# Altium PCB FPW1-0-0.PcbDoc
Units mm, origin at the board's own origin, x right, y up, seen from the top; angles counter-clockwise.
Board outline 81.28 x 53.34 mm, 4 copper layers (Top Layer, GND Plane 1, 3v3 Plane 2, Bottom Layer); 180 components, 250 nets, 840 pads, 6 vias.
Unrouted connection lines stored in the file: 525.
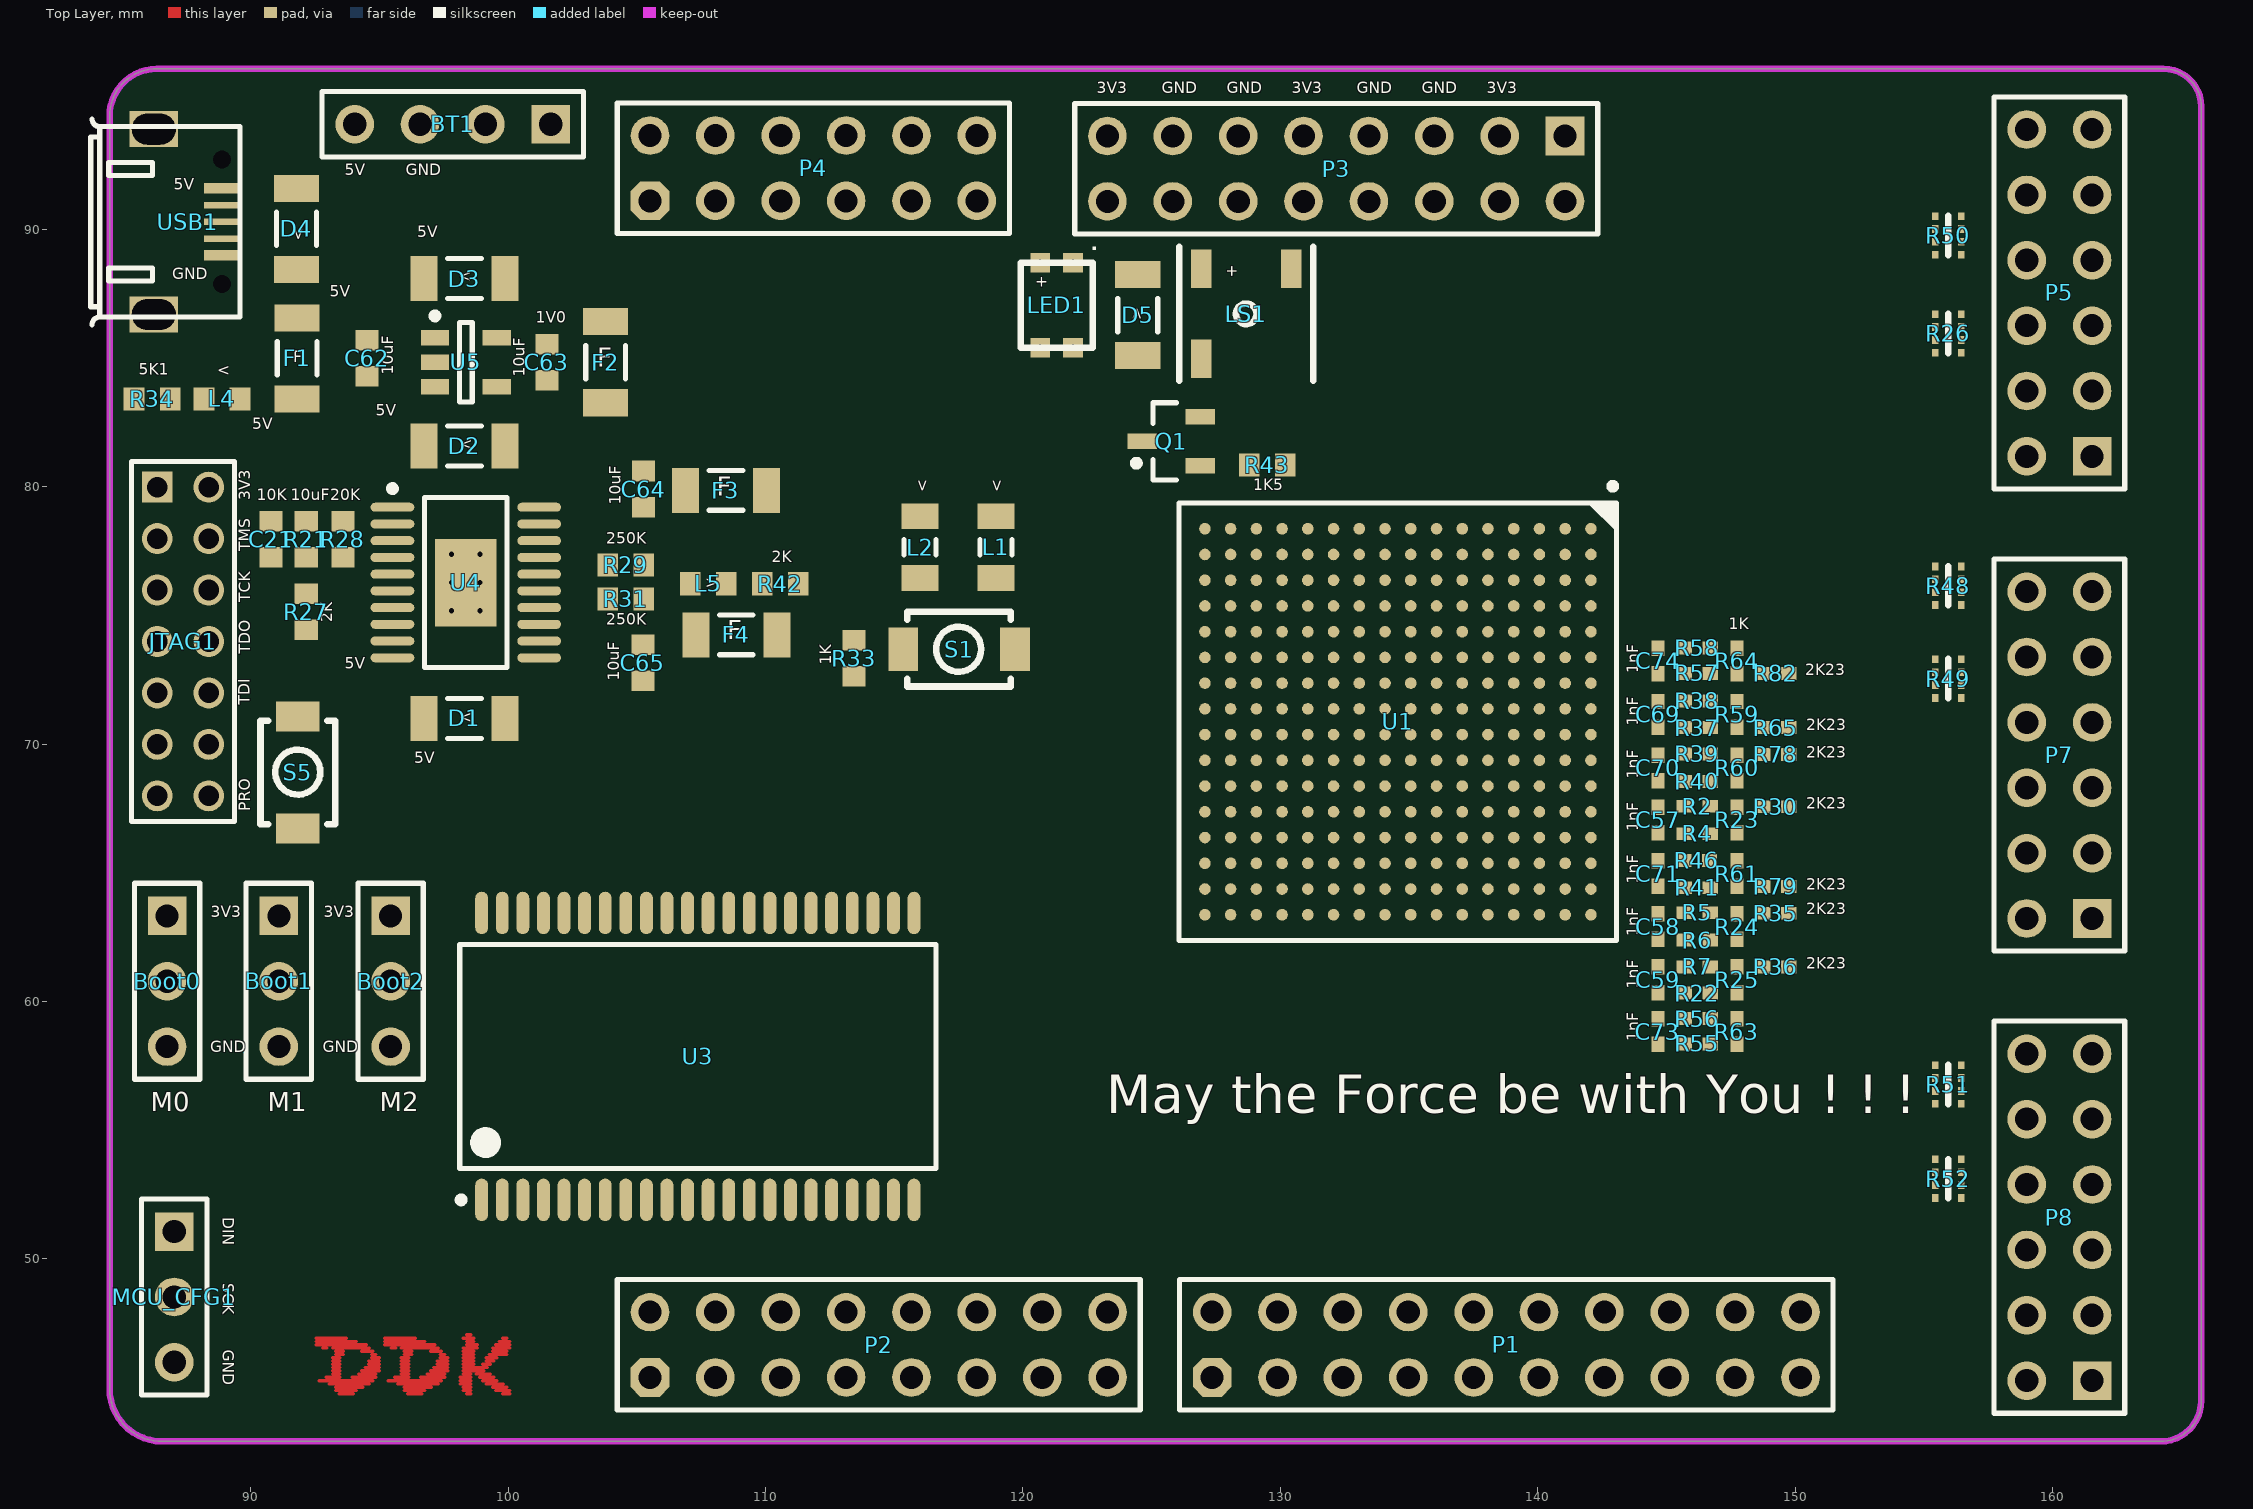
[diagram p0: Top Layer view]
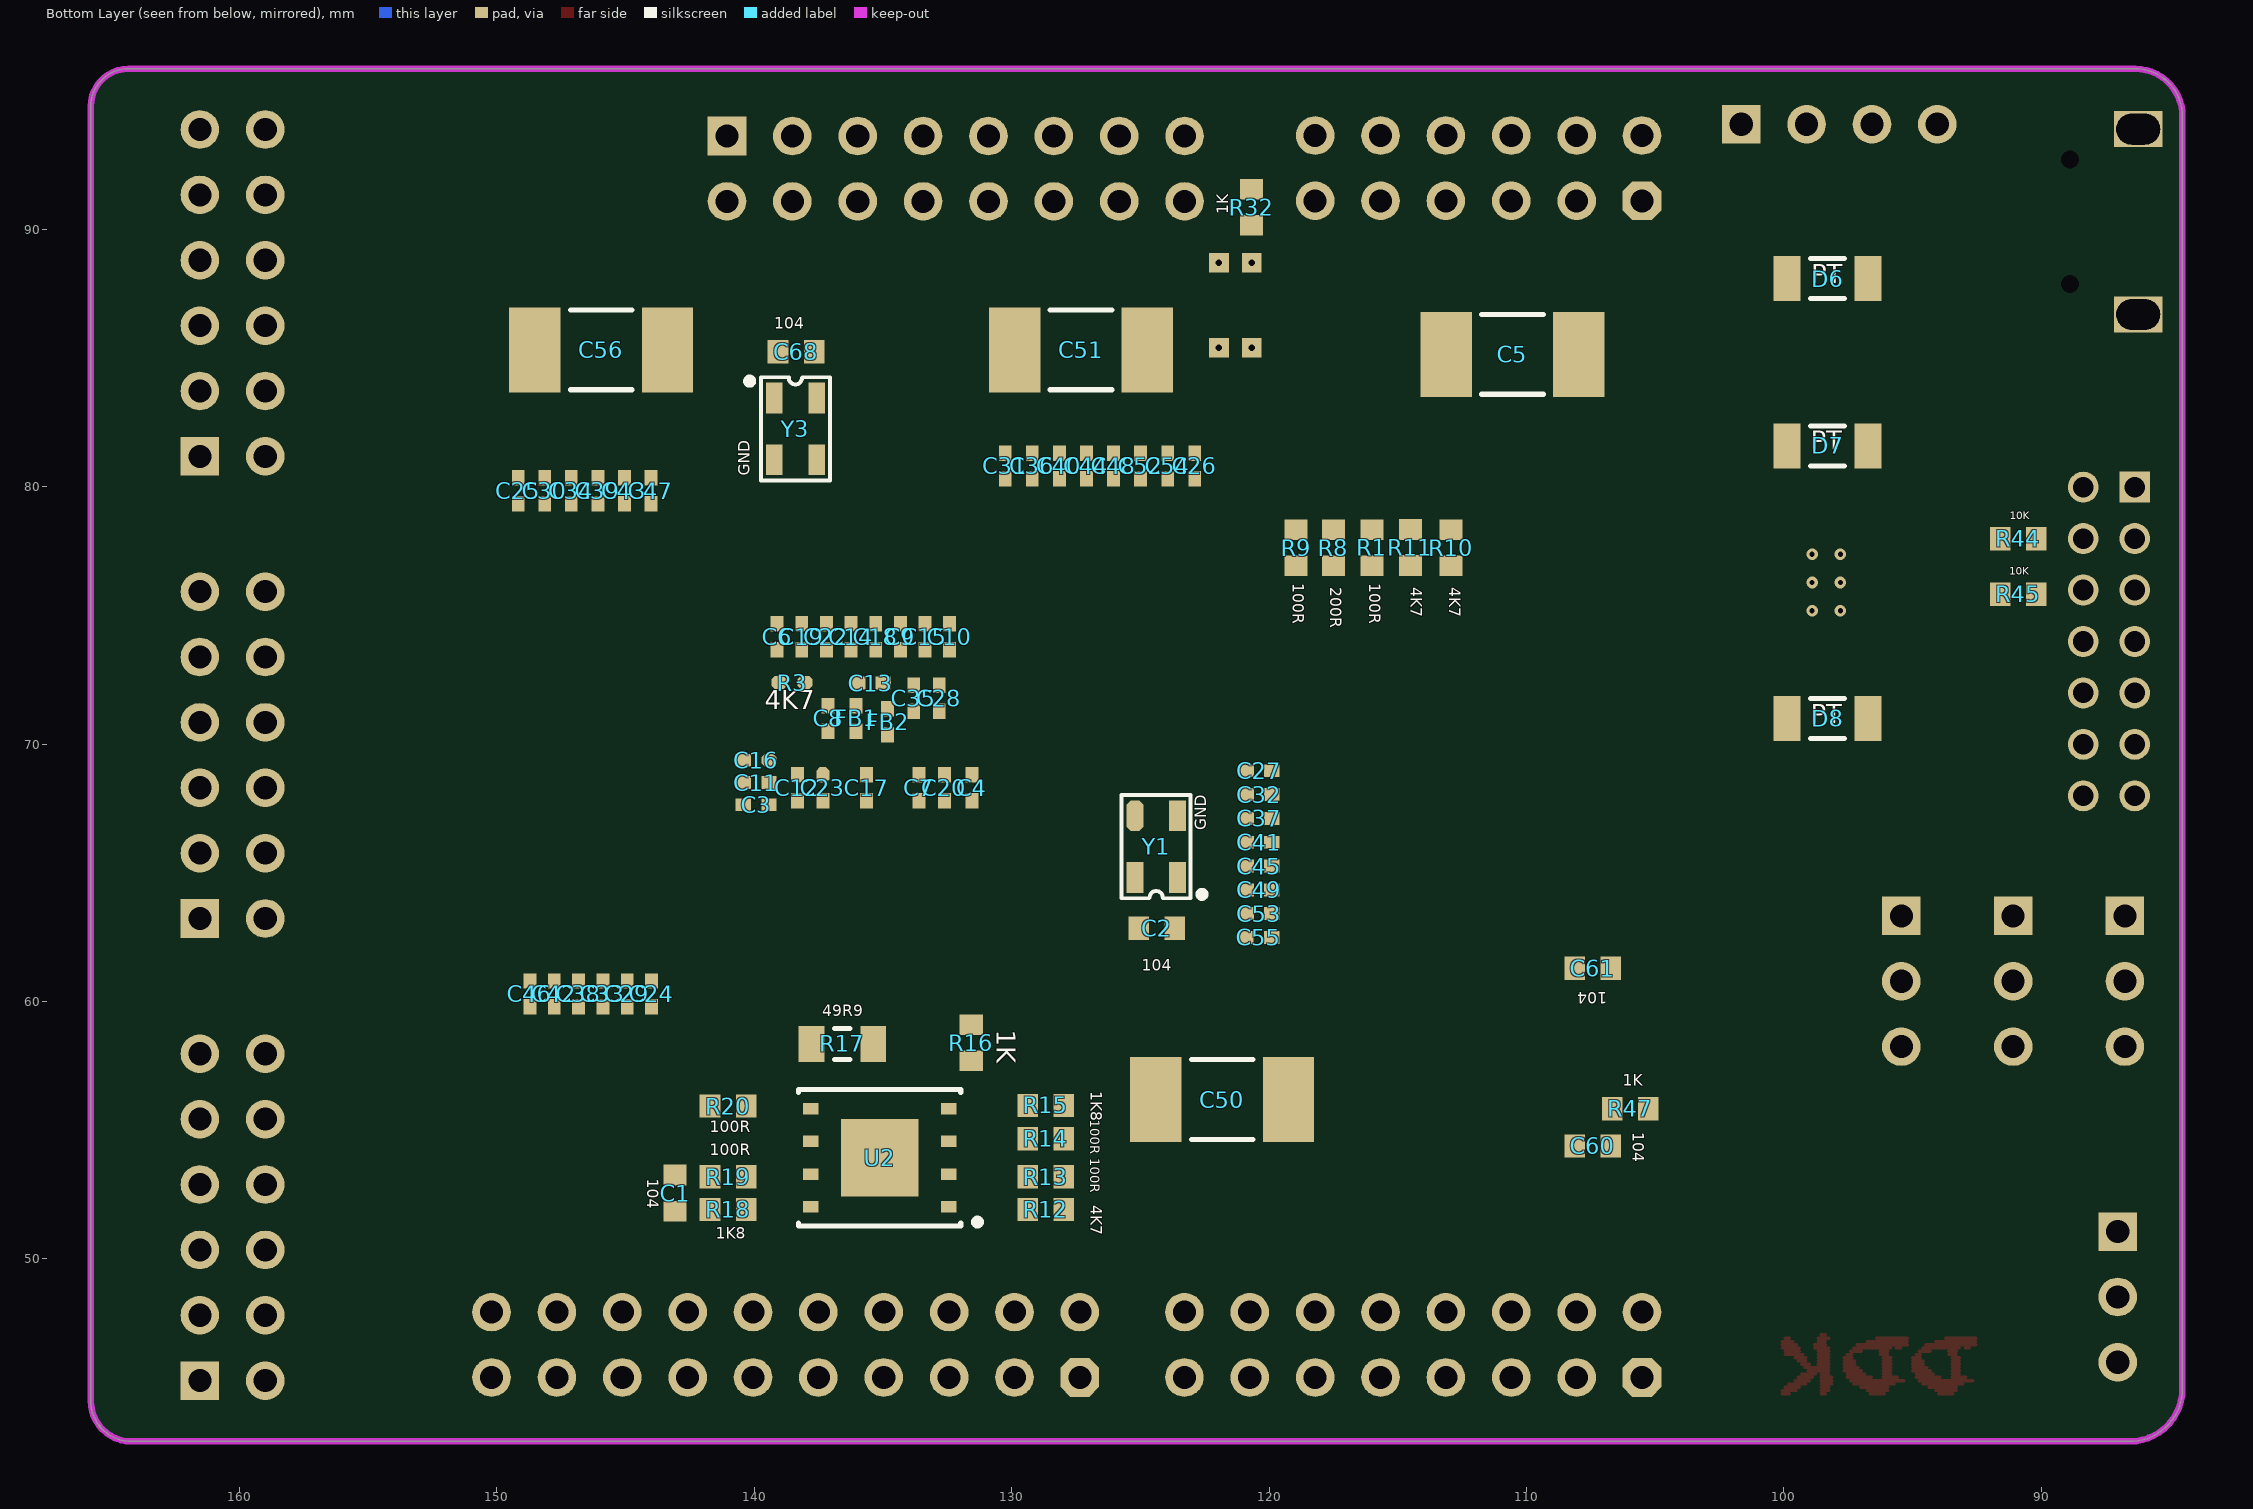
[diagram p1: Bottom Layer view, seen from below]
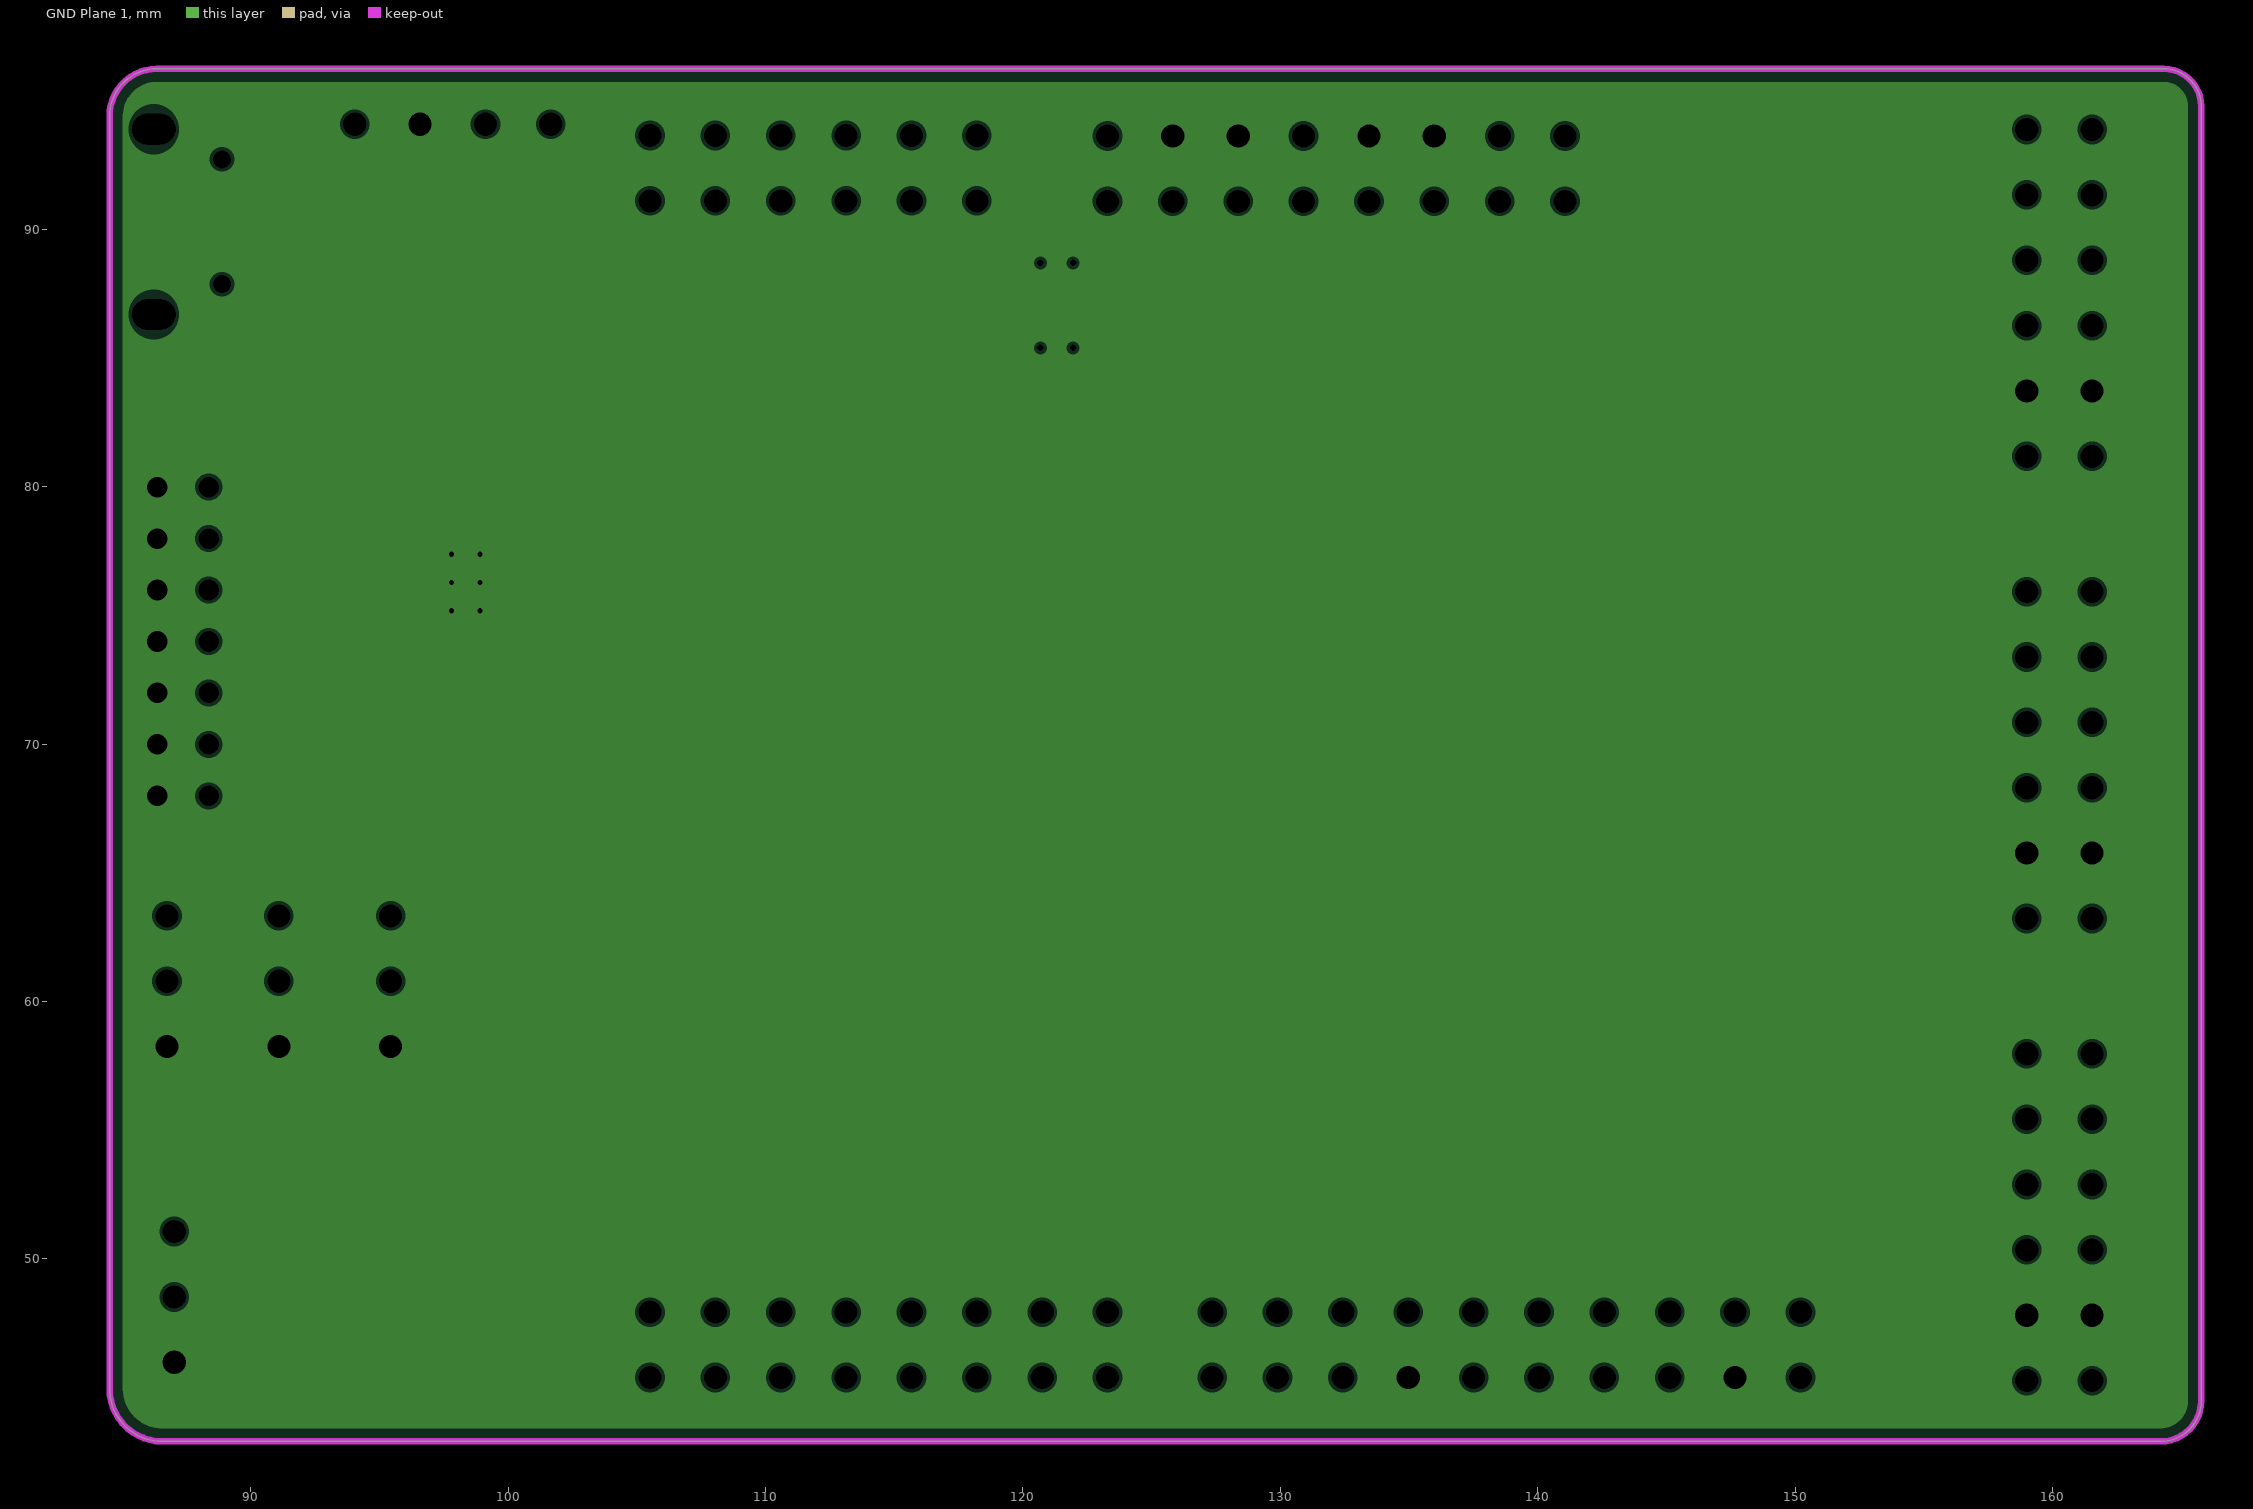
[diagram p2: GND Plane 1, clearances drawn from the general rule]
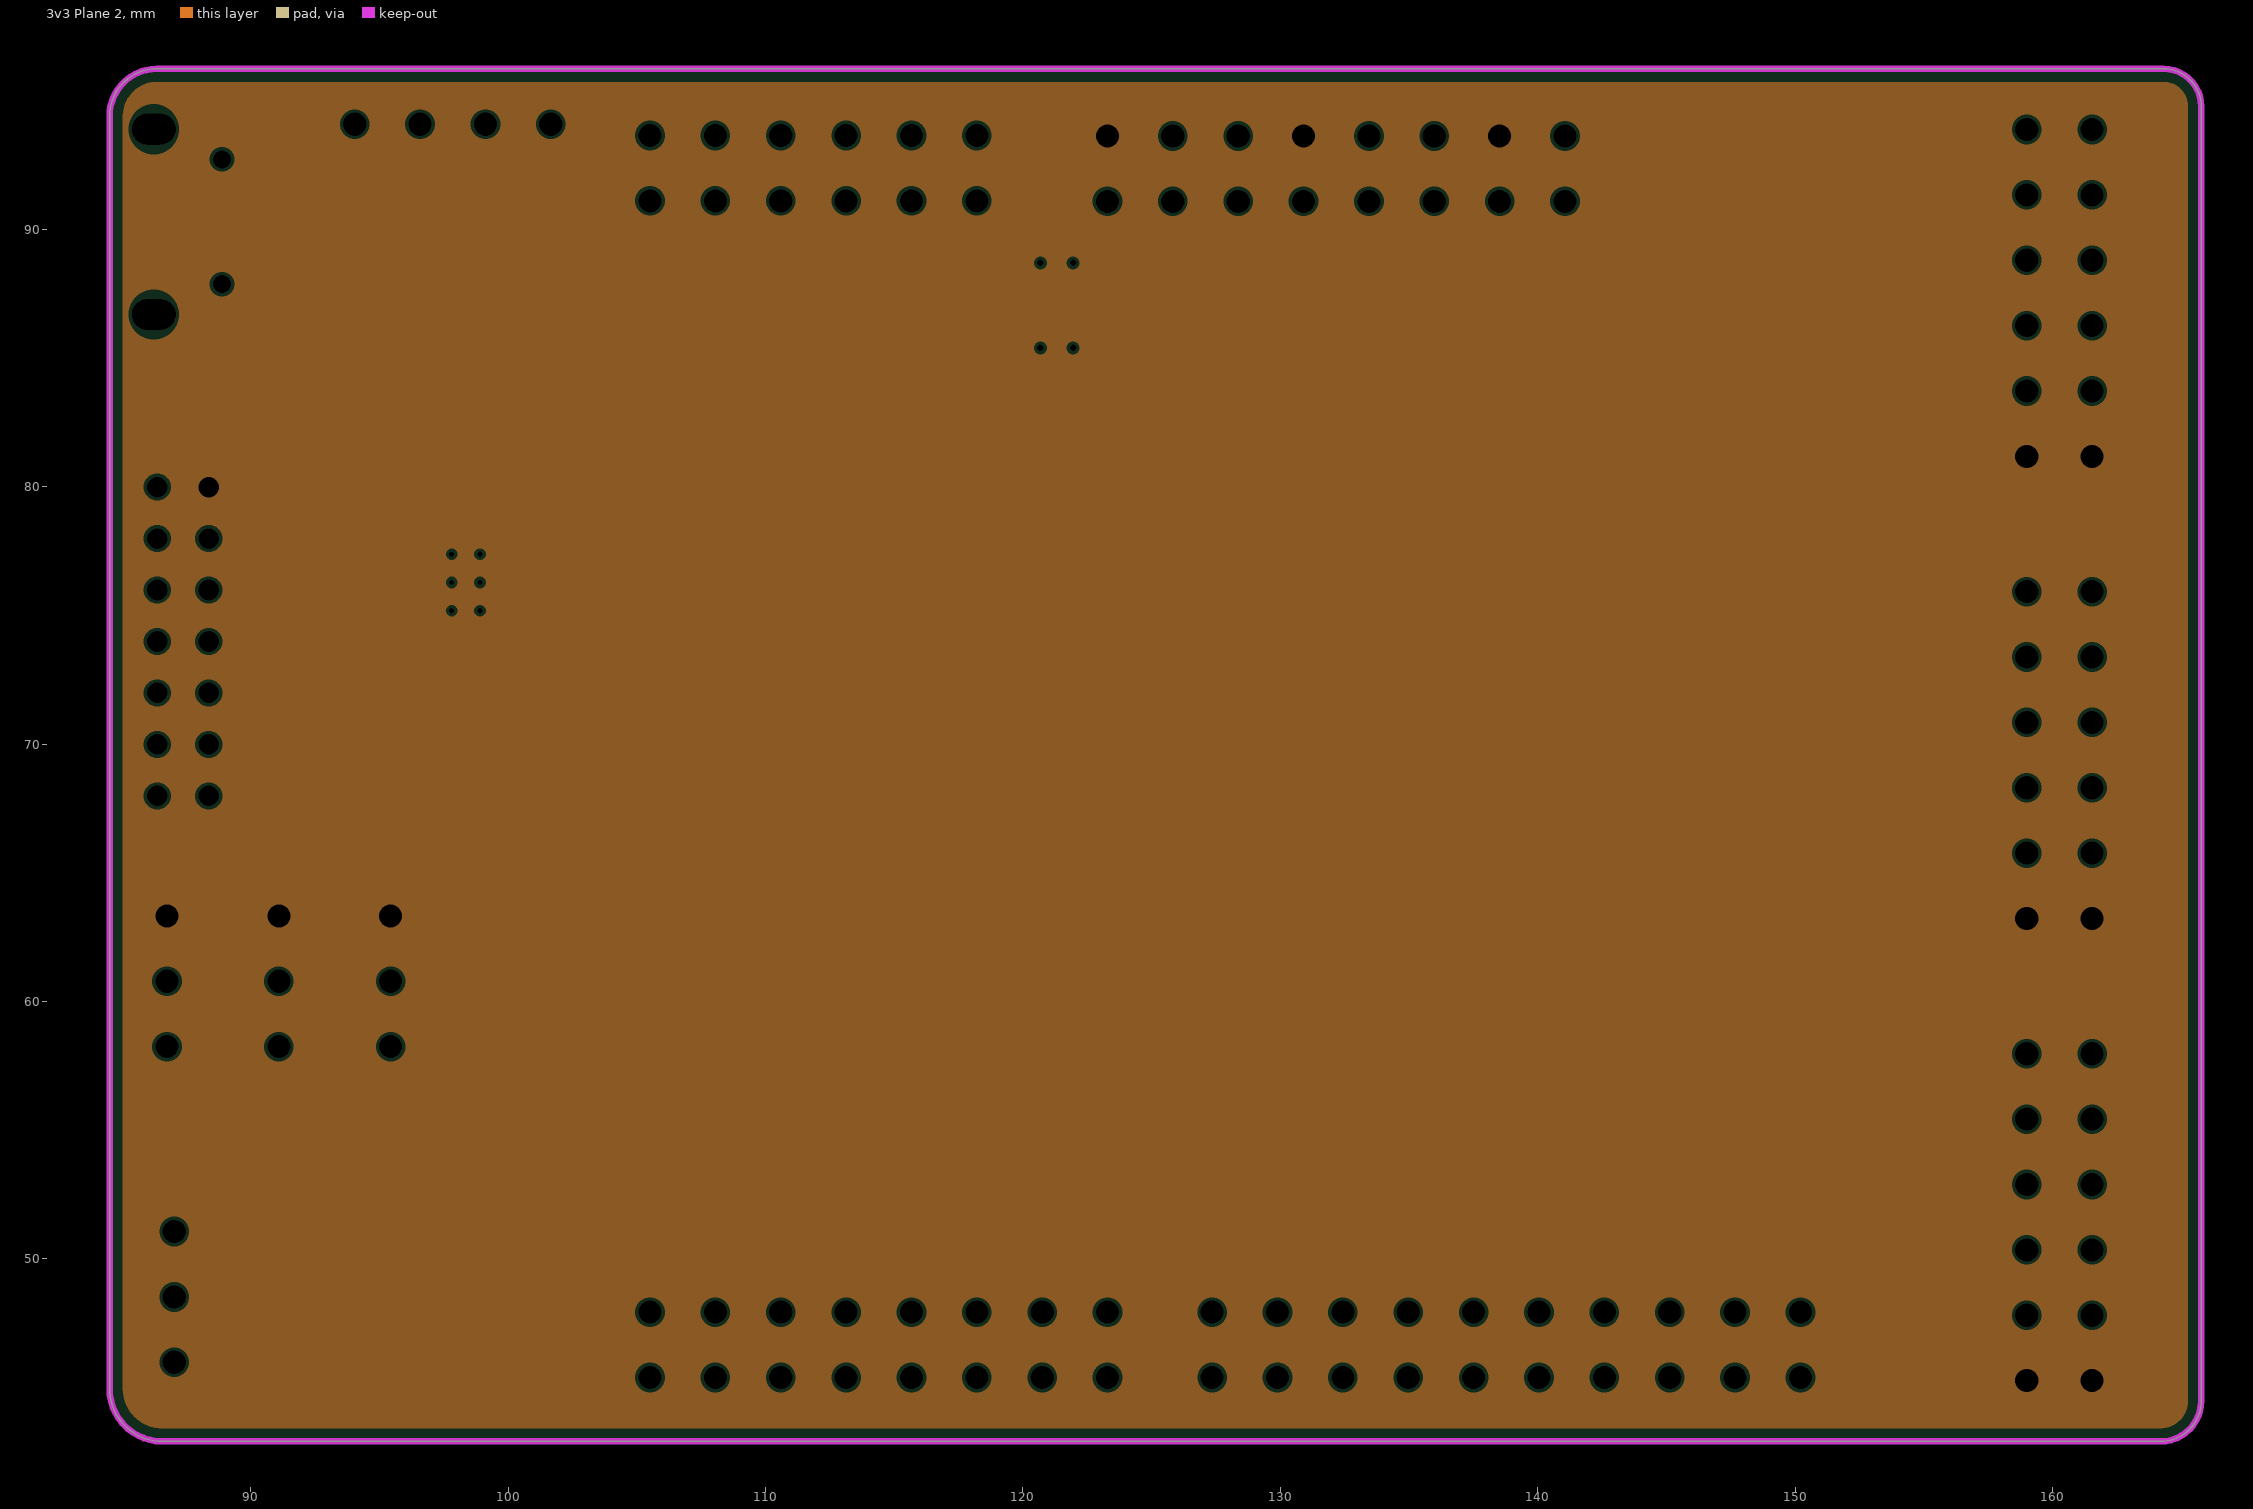
[diagram p3: 3v3 Plane 2, clearances drawn from the general rule]

## Layer stack, top to bottom
Top Layer: signal copper 0.0356
Dielectric: core 0.32, FR-4, Dk 4.8
GND Plane 1: plane copper 0.0356, net GND
Dielectric: prepreg 0.32, FR-4, Dk 4.8
3v3 Plane 2: plane copper 0.0356, net 3V3
Dielectric: core 0.32, FR-4, Dk 4.8
Bottom Layer: signal copper 0.0356

## Board outline
84.506,44.951 84.506,94.401 cw(c86.346,94.401) 86.346,96.241 164.316,96.241 cw(c164.316,94.771) 165.786,94.771 165.786,44.481 cw(c164.206,44.481) 164.206,42.901 86.556,42.901 cw(c86.556,44.951)

## Design rules (kind name [scope] priority, off if disabled: settings)
Clearance ne2rvia [(IsPad OR IsVia)] p1: gap=0.127
Clearance all [All] p2: gap=0.089
DiffPairsRouting [All] p1: maxlimit=0.254 minlimit=0.254 mostfreqgap=0.254 maxuncoupledlength=12.7
PlaneClearance [All] p1: clearance=0.127
PlaneConnect [All] p1: planeconnectstyle=Direct reliefexpansion=0.508 reliefentries=4 reliefconductorwidth=0.254 reliefairgap=0.254
PolygonConnect [All] p1: connectstyle=Relief reliefconductorwidth=0.254 reliefentries=4 polygonreliefangle="90 Angle" airgapwidth=0.254
RoutingVias [All] p1: holewidth=0.711 width=1.27 viastyle="Through Hole" minholewidth=0.2 minwidth=0.45 maxholewidth=0.711 maxwidth=1.27
SolderMaskExpansion [All] p1: expansion=0.025
Width [All] p1: maxlimit=1.27 minlimit=0.089 preferedwidth=0.254 minimp=50.000000 maximp=50.000000 favimp=50.000000
25 further rules are at their usual default settings.

## Classes and differential pairs
net class QEI_B[3..0]: QEI_B1 QEI_B2 QEI_B3
component class power: C21 C62 C63 C64 C65 D1 D2 D3 D4 D6 D7 D8 F1 F2 F3 F4 L4 L5 R21 R27 R28 R29 R31 R34 R42 U4 U5 USB1
net class SRAM-DQ[7..0]: SRAM-DQ0 SRAM-DQ1 SRAM-DQ2 SRAM-DQ3 SRAM-DQ4 SRAM-DQ5 SRAM-DQ6 SRAM-DQ7
net class SRAM-A[18..0]: SRAM-A0 SRAM-A1 SRAM-A2 SRAM-A3 SRAM-A4 SRAM-A5 SRAM-A6 SRAM-A7 SRAM-A8 SRAM-A9 SRAM-A10 SRAM-A11 SRAM-A12 SRAM-A13 SRAM-A14 SRAM-A15 SRAM-A16 SRAM-A17 SRAM-A18
net class BANK35_IO[42..1]: BANK35_IO1 BANK35_IO2 BANK35_IO3 BANK35_IO4 BANK35_IO5 BANK35_IO6 BANK35_IO7 BANK35_IO8 BANK35_IO9 BANK35_IO10 BANK35_IO11 BANK35_IO12 BANK35_IO13 BANK35_IO14 BANK35_IO15 BANK35_IO16 BANK35_IO17 BANK35_IO18 BANK35_IO19 BANK35_IO20 BANK35_IO21 BANK35_IO22 BANK35_IO23 BANK35_IO24 BANK35_IO25 BANK35_IO26 BANK35_IO27 BANK35_IO28 BANK35_IO29 BANK35_IO30 BANK35_IO31 BANK35_IO32 BANK35_IO33 BANK35_IO34 BANK35_IO35 BANK35_IO36 BANK35_IO37 BANK35_IO38 BANK35_IO39 BANK35_IO40 BANK35_IO41 BANK35_IO42 IO0
component class FPGA_CFG: Boot0 Boot1 Boot2 JTAG1 L1 L2 MCU_CFG1 R1 R3 R8 R9 R10 R11 R44 R45 S5 U1
component class MEMORY: C60 C61 R47 U3
component class IO: BT1 C57 C58 C59 C69 C70 C71 C73 C74 D5 LED1 LS1 P1 P2 P3 P4 P5 P7 P8 Q1 R2 R4 R5 R6 R7 R22 R23 R24 R25 R26 R30 R32 R33 R35 R36 R37 R38 R39 R40 R41 R43 R46 R48 R49 R50 R51 R52 R55 R56 R57 R58 R59 R60 R61 R63 R64 R65 R78 R79 R82 S1
component class FPGA_IO: C1 C2 C68 R12 R13 R14 R15 R16 R17 R18 R19 R20 U2 Y1 Y3
component class FPGA_POWER: C3 C4 C5 C6 C7 C8 C9 C10 C11 C12 C13 C14 C15 C16 C17 C18 C19 C20 C22 C23 C24 C25 C26 C27 C28 C29 C30 C31 C32 C33 C34 C35 C36 C37 C38 C39 C40 C41 C42 C43 C44 C45 C46 C47 C48 C49 C50 C51 C52 C53 C54 C55 C56 FB1 FB2
net class BANK14_IO[10..1]: BANK14_IO1 BANK14_IO2 BANK14_IO3 BANK14_IO4 BANK14_IO5 BANK14_IO6 BANK14_IO7 BANK14_IO8 BANK14_IO9 BANK14_IO10
net class BANK15_IO[36..1]: BANK15_IO1 BANK15_IO2 BANK15_IO3 BANK15_IO4 BANK15_IO5 BANK15_IO6 BANK15_IO7 BANK15_IO8 BANK15_IO9 BANK15_IO10 BANK15_IO11 BANK15_IO12 BANK15_IO13 BANK15_IO14 BANK15_IO15 BANK15_IO16 BANK15_IO17 BANK15_IO18 BANK15_IO19 BANK15_IO20 BANK15_IO21 BANK15_IO22 BANK15_IO23 BANK15_IO24 BANK15_IO25 BANK15_IO26 BANK15_IO27 BANK15_IO28 BANK15_IO29 BANK15_IO30 BANK15_IO31 BANK15_IO32 BANK15_IO33 BANK15_IO34 BANK15_IO35 BANK15_IO36
net class BANK34_IO[20..1]: BANK34_IO1 BANK34_IO2 BANK34_IO3 BANK34_IO4 BANK34_IO5 BANK34_IO6 BANK34_IO7 BANK34_IO8 BANK34_IO9 BANK34_IO10 BANK34_IO11 BANK34_IO12 BANK34_IO13 BANK34_IO14 BANK34_IO15 BANK34_IO16 BANK34_IO17 BANK34_IO18 BANK34_IO19 BANK34_IO20
differential pair AD12: +AD12_P -AD12_N
differential pair AD11: +AD11_P -AD11_N
differential pair AD10: +AD10_P -AD10_N
differential pair AD9: +AD9_P -AD9_N
differential pair AD8: +AD8_P -AD8_N
differential pair AD4: +AD4_P -AD4_N
differential pair AD3: +AD3_P -AD3_N
differential pair AD2: +AD2_P -AD2_N
differential pair AD1: +AD1_P -AD1_N

## Components (designator, comment, footprint, x,y, rotation, side; value= is the part's Value field where it differs from the comment)
Boot0 "Header 3" HDR1X3 86.741,63.322 r270 top
Boot1 "Header 3" HDR1X3 91.084,63.322 r270 top
Boot2 "Header 3" HDR1X3 95.428,63.322 r270 top
BT1 "Header 4" HDR1X4 101.651,94.082 r180 top
C1 "Cap" 1608[0603] 143.078,52.553 r90 bottom (schematic designator C16)
C2 "Cap" 1608[0603] 124.358,62.84 r0 bottom
C3 "Cap" 0402#1 139.929,67.64 r0 bottom
C4 "Cap" 0402#1 131.547,68.301 r270 bottom
C5 "Cap" 2512 110.541,85.141 r0 bottom (schematic designator C20)
C6 "Cap" 0402#1 139.116,74.168 r90 bottom (schematic designator C53)
C7 "Cap" 0402#1 133.604,68.301 r270 bottom
C8 "Cap" 0402#1 137.135,70.993 r90 bottom (schematic designator C29)
C9 "Cap" 0402#1 134.326,74.168 r90 bottom (schematic designator C30)
C10 "Cap" 0402#1 132.41,74.168 r90 bottom (schematic designator C31)
C11 "Cap" 0402#1 139.929,68.504 r0 bottom
C12 "Cap" 0402#1 138.328,68.301 r270 bottom
C13 "Cap" 0402#1 135.484,72.365 r180 bottom (schematic designator C56)
C14 "Cap" 0402#1 136.242,74.168 r90 bottom (schematic designator C96)
C15 "Cap" 0402#1 133.368,74.168 r90 bottom (schematic designator C95)
C16 "Cap" 0402#2 139.929,69.367 r0 bottom
C17 "Cap" 0402#1 135.636,68.301 r270 bottom
C18 "Cap" 0402#1 135.284,74.168 r90 bottom (schematic designator C91)
C19 "Cap" 0402#1 138.158,74.168 r90 bottom (schematic designator C92)
C20 "Cap" 0402#1 132.613,68.301 r270 bottom (schematic designator C90)
C21 "Cap" 1608[0603] 90.78,77.953 r270 top
C22 "Cap" 0402#1 137.2,74.168 r90 bottom (schematic designator C75)
C23 "Cap" 0402#2 137.338,68.301 r270 bottom
C24 "Cap" 0402#1 143.993,60.292 r270 bottom
C25 "Cap" 0402#1 149.174,79.84 r90 bottom
C26 "Cap" 0402#1 122.885,80.805 r90 bottom
C27 "Cap" 0402#1 120.388,68.961 r180 bottom
C28 "Cap" 0402#1 132.817,71.78 r90 bottom
C29 "Cap" 0402#1 144.937,60.292 r270 bottom
C30 "Cap" 0402#1 148.143,79.84 r90 bottom
C31 "Cap" 0402#1 130.251,80.805 r90 bottom
C32 "Cap" 0402#1 120.388,68.036 r180 bottom
C33 "Cap" 0402#1 145.882,60.292 r270 bottom
C34 "Cap" 0402#1 147.112,79.84 r90 bottom
C35 "Cap" 0402#1 133.807,71.78 r90 bottom
C36 "Cap" 0402#1 129.199,80.805 r90 bottom
C37 "Cap" 0402#1 120.388,67.11 r180 bottom
C38 "Cap" 0402#1 146.827,60.292 r270 bottom
C39 "Cap" 0402#1 146.08,79.84 r90 bottom
C40 "Cap" 0402#1 128.147,80.805 r90 bottom
C41 "Cap" 0402#1 120.388,66.185 r180 bottom
C42 "Cap" 0402#1 147.772,60.292 r270 bottom
C43 "Cap" 0402#1 145.049,79.84 r90 bottom
C44 "Cap" 0402#1 127.094,80.805 r90 bottom
C45 "Cap" 0402#1 120.388,65.26 r180 bottom
C46 "Cap" 0402#1 148.717,60.292 r270 bottom
C47 "Cap" 0402#1 144.018,79.84 r90 bottom
C48 "Cap" 0402#1 126.042,80.805 r90 bottom
C49 "Cap" 0402#1 120.388,64.335 r180 bottom
C50 "Cap" 2512 121.818,56.185 r180 bottom
C51 "Cap" 2512 127.305,85.319 r180 bottom
C52 "Cap" 0402#1 124.99,80.805 r90 bottom
C53 "Cap" 0402#1 120.388,63.409 r180 bottom
C54 "Cap" 0402#1 123.937,80.805 r90 bottom
C55 "Cap" 0402#1 120.396,62.484 r180 bottom
C56 "Cap" 2512 145.948,85.319 r0 bottom
C57 "Cap" 0402#1 144.678,67.048 r90 top (schematic designator C52)
C58 "Cap" 0402#1 144.678,62.909 r90 top (schematic designator C39)
C59 "Cap" 0402#1 144.678,60.841 r90 top (schematic designator C40)
C60 "Cap" 1608[0603] 107.417,54.381 r180 bottom (schematic designator C41)
C61 "Cap" 1608[0603] 107.417,61.29 r180 bottom (schematic designator C42)
C62 "Cap" 1608[0603] 94.513,84.988 r270 top (schematic designator C43)
C63 "Cap" 1608[0603] 101.498,84.836 r270 top (schematic designator C44)
C64 "Cap" 1608[0603] 105.258,79.908 r90 top (schematic designator C32)
C65 "Cap" 1608[0603] 105.232,73.152 r270 top (schematic designator C33)
C68 "Cap" 1608[0603] 138.379,85.242 r180 bottom
C69 "Cap" 0402#1 144.678,71.152 r270 top
C70 "Cap" 0402#1 144.678,69.071 r90 top
C71 "Cap" 0402#1 144.678,64.967 r270 top
C73 "Cap" 0402#1 144.67,58.828 r270 top
C74 "Cap" 0402#1 144.678,73.228 r270 top
D1 "SK34" 1206 98.298,70.993 r180 top
D2 "SK34" 1206 98.298,81.585 r180 top
D3 "SK34" 1206 98.298,88.087 r180 top
D4 "SK34" 1206 91.77,90.018 r270 top
D5 "SK34" 1206 124.46,86.665 r90 top
D6 "稳压" 1206 98.298,88.087 r0 bottom
D7 "稳压" 1206 98.298,81.585 r0 bottom
D8 "稳压" 1206 98.298,70.993 r0 bottom
F1 "Fuse 1" 1206 91.796,84.988 r90 top
F2 "Fuse 1" 1206 103.784,84.836 r90 top
F3 "Fuse 1" 1206 108.458,79.858 r180 top
F4 "Fuse 1" 1206 108.864,74.244 r180 top
FB1 "Inductor" 0402#1 136.042,70.993 r90 bottom (schematic designator FB2)
FB2 "Inductor" 0402#1 134.823,70.866 r90 bottom (schematic designator FB1)
JTAG1 "MHDR2X7" "Hearder2 7X2" 86.36,79.985 r0 top
L1 "LED" C2012 118.948,77.648 r270 top (schematic designator L8)
L2 "LED" C2012 116.002,77.648 r270 top
L4 "LED" 1608[0603] 88.875,83.414 r180 top
L5 "LED" 1608[0603] 107.772,76.225 r0 top
LED1 "RGB_LED1206" RGB 121.31,87.046 r270 top
LS1 "Bell" "MLT-5020 BZ" 128.676,86.716 r270 top
MCU_CFG1 "Header 3" HDR1X3 87.02,51.054 r270 top
P1 "Header 10X2" HDR2X10 127.351,45.386 r0 top
P2 "Header 8X2" HDR2X8#1 105.507,45.386 r0 top
P3 "Header 8X2" HDR2X8#2 141.062,93.626 r180 top
P4 "Header 6X2" HDR2X6#1 105.507,91.106 r0 top
P5 "Header 6X2" HDR2X6#2 161.544,81.178 r90 top
P7 "Header 6X2" HDR2X6#2 161.544,63.221 r90 top
P8 "Header 6X2" HDR2X6#2 161.544,45.263 r90 top
Q1 "QNPN" SOT23_N 125.755,81.763 r180 top
R1 "Res" 1608[0603] 116.002,77.622 r270 bottom
R2 "Res" 0402#1 146.202,67.581 r0 top
R3 "Res" 0402#3 138.532,72.39 r180 bottom (schematic designator R51)
R4 "Res" 0402#1 146.202,66.513 r0 top
R5 "Res" 0402#1 146.202,63.446 r0 top
R6 "Res" 0402#1 146.202,62.378 r0 top
R7 "Res" 0402#1 146.202,61.341 r0 top
R8 "Res" 1608[0603] 117.5,77.622 r90 bottom (schematic designator R63)
R9 "Res" 1608[0603] 118.948,77.622 r270 bottom (schematic designator R64)
R10 "Res" 1608[0603] 112.928,77.622 r90 bottom (schematic designator R55)
R11 "Res" 1608[0603] 114.503,77.637 r90 bottom (schematic designator R49)
R12 "Res" 1608[0603] 128.676,51.918 r0 bottom (schematic designator R66)
R13 "Res" 1608[0603] 128.676,53.188 r180 bottom (schematic designator R62)
R14 "Res" 1608[0603] 128.676,54.661 r180 bottom (schematic designator R54)
R15 "Res" 1608[0603] 128.676,55.956 r0 bottom (schematic designator R52)
R16 "Res" 1608[0603] 131.572,58.395 r90 bottom
R17 "Res" R2012 136.576,58.344 r180 bottom (schematic designator R59)
R18 "Res" 1608[0603] 141.021,51.918 r180 bottom (schematic designator R57)
R19 "Res" 1608[0603] 141.021,53.188 r180 bottom (schematic designator R37)
R20 "Res" 1608[0603] 141.021,55.931 r180 bottom
R21 "Res" 1608[0603] 92.151,77.953 r270 top
R22 "Res" 0402#1 146.202,60.325 r0 top
R23 "Res" 0402#1 147.752,67.048 r90 top
R24 "Res" 0402#1 147.752,62.909 r90 top (schematic designator R47)
R25 "Res" 0402#1 147.752,60.841 r90 top (schematic designator R48)
R26 "res*4" RES*4 155.956,85.954 r0 top
R27 "Res" 1608[0603] 92.151,75.133 r270 top
R28 "Res" 1608[0603] 93.574,77.953 r90 top
R29 "Res" 1608[0603] 104.572,76.962 r180 top
R30 "Res" 0402#1 149.25,67.564 r180 top (schematic designator R46)
R31 "Res" 1608[0603] 104.572,75.641 r180 top
R32 "Res" 1608[0603] 120.675,90.856 r90 bottom
R33 "Res" 1608[0603] 113.436,73.33 r90 top
R34 "Res" 1608[0603] 86.157,83.414 r0 top
R35 "Res" 0402#1 149.25,63.424 r180 top
R36 "Res" 0402#1 149.25,61.341 r180 top (schematic designator R21)
R37 "Res" 0402#1 146.202,70.637 r0 top (schematic designator R22)
R38 "Res" 0402#1 146.202,71.679 r0 top
R39 "Res" 0402#1 146.202,69.617 r0 top
R40 "Res" 0402#1 146.202,68.549 r0 top (schematic designator R20)
R41 "Res" 0402#1 146.202,64.414 r0 top (schematic designator R19)
R42 "Res" 1608[0603] 110.566,76.225 r180 top
R43 "Res2" 1608[0603] 129.489,80.848 r0 top
R44 "Res" 1608[0603] 90.881,77.978 r0 bottom
R45 "Res" 1608[0603] 90.881,75.819 r0 bottom
R46 "Res" 0402#1 146.177,65.481 r0 top (schematic designator R14)
R47 "Res" 1608[0603] 105.969,55.829 r0 bottom (schematic designator R13)
R48 "res*4" RES*4 155.956,76.149 r180 top
R49 "res*4" RES*4 155.956,72.542 r180 top
R50 "res*4" RES*4 155.956,89.764 r180 top
R51 "res*4" RES*4 155.956,56.769 r180 top
R52 "res*4" RES*4 155.956,53.111 r180 top
R55 "Res" 0402#1 146.202,58.344 r0 top
R56 "Res" 0402#1 146.202,59.334 r0 top
R57 "Res" 0402#1 146.202,72.746 r0 top
R58 "Res" 0402#1 146.202,73.736 r0 top
R59 "Res" 0402#1 147.752,71.152 r270 top
R60 "Res" 0402#1 147.752,69.071 r90 top
R61 "Res" 0402#1 147.752,64.967 r270 top
R63 "Res" 0402#1 147.744,58.828 r270 top
R64 "Res" 0402#1 147.752,73.228 r270 top
R65 "Res" 0402#1 149.25,70.637 r180 top
R78 "Res" 0402#1 149.25,69.596 r180 top
R79 "Res" 0402#1 149.25,64.465 r180 top
R82 "Res" 0402#1 149.25,72.746 r180 top
S1 "SW-PB" "key 3*4*2" 117.5,73.685 r180 top
S5 "SW-PB" "key 3*4*2" 91.821,68.91 r90 top
U1 "XC7A35T-1FTG256" BGA100P9X9-81A 134.569,70.866 r270 top
U2 "N25Q032A" QFN127P500X600X100_HS-9N 135.128,53.924 r0 bottom
U3 "IS61WV5128" "SOP127P600-8N IS61WV5128" 107.366,57.861 r90 top
U4 "TPS70151" TPS701 98.349,76.276 r0 top
U5 "TLV71210" TLV712 98.349,84.836 r0 top
USB1 "USB_5line" USB-MICRO-5P-2F 88.875,91.592 r90 top
Y1 "100MHZ" XTAL7_3225#1 124.384,66.015 r90 bottom
Y3 "XMHZ" XTAL7_3225#2 138.405,82.245 r270 bottom

## Footprints (in the part's own frame and the unit in brackets; to place one, negate y for a bottom-side part, rotate by r counter-clockwise, add the part's x,y. Pads: shape width x height; smd on the part's side, far side on the other; paste and mask are expansions set on the pad)
0402#1 [mm] "Chip Capacitor, Body 1.0x0.5mm, IPC High Density"
  rect 0.6x0.5 smd: 1(-0.5,0) 2(0.5,0)
  body extent -0.55,-0.3 0.55,0.3, height 1.3
0402#2 [mm] "Chip Capacitor, Body 1.0x0.5mm, IPC High Density"
  oct 0.6x0.5 smd: 1(-0.5,0)
  rect 0.6x0.5 smd: 2(0.5,0)
  body extent -0.55,-0.3 0.55,0.3, height 1.3
0402#3 [mm] "Chip Capacitor, Body 1.0x0.5mm, IPC High Density"
  oct 0.6x0.5 smd: 1(-0.5,0) 2(0.5,0)
  body extent -0.55,-0.3 0.55,0.3, height 1.3
1206 [mm]
  rect 1.05x1.75 smd: 1(-1.575,0) 2(1.575,0)
  silkscreen extent -0.65,-0.77 0.65,0.77, body extent -1.6,-0.8 1.6,0.8, height 1.6
1608[0603] [mm] "Chip Capacitor, Body 1.6x0.8mm, IPC High Density"
  rect 0.8x0.9 smd: 1(-0.7,0) 2(0.7,0)
  body extent -0.87,-0.48 0.87,0.48, height 1.3
2512 [mm]
  rect 2x3.3 smd: 1(-2.575,0) 2(2.575,0)
  silkscreen extent -1.2,-1.55 1.2,1.55, body extent -3.17,-1.6 3.17,1.6, height 0.65
BGA100P9X9-81A [mm] "XC7A35T-1FTG256"
  round 0.45 smd: A1(-7.5,7.5) A2(-6.5,7.5) A3(-5.5,7.5) A4(-4.5,7.5) A5(-3.5,7.5) A6(-2.5,7.5) A7(-1.5,7.5) A8(-0.5,7.5) A9(0.5,7.5) A10(1.5,7.5) A11(2.5,7.5) A12(3.5,7.5) A13(4.5,7.5) A14(5.5,7.5) A15(6.5,7.5) A16(7.5,7.5) B1(-7.5,6.5) B2(-6.5,6.5) B3(-5.5,6.5) B4(-4.5,6.5) B5(-3.5,6.5) B6(-2.5,6.5) B7(-1.5,6.5) B8(-0.5,6.5) B9(0.5,6.5) B10(1.5,6.5) B11(2.5,6.5) B12(3.5,6.5) B13(4.5,6.5) B14(5.5,6.5) B15(6.5,6.5) B16(7.5,6.5) C1(-7.5,5.5) C2(-6.5,5.5) C3(-5.5,5.5) C4(-4.5,5.5) C5(-3.5,5.5) C6(-2.5,5.5) C7(-1.5,5.5) C8(-0.5,5.5) C9(0.5,5.5) C10(1.5,5.5) C11(2.5,5.5) C12(3.5,5.5) C13(4.5,5.5) C14(5.5,5.5) C15(6.5,5.5) C16(7.5,5.5) D1(-7.5,4.5) D2(-6.5,4.5) D3(-5.5,4.5) D4(-4.5,4.5) D5(-3.5,4.5) D6(-2.5,4.5) D7(-1.5,4.5) D8(-0.5,4.5) D9(0.5,4.5) D10(1.5,4.5) D11(2.5,4.5) D12(3.5,4.5) D13(4.5,4.5) D14(5.5,4.5) D15(6.5,4.5) D16(7.5,4.5) E1(-7.5,3.5) E2(-6.5,3.5) E3(-5.5,3.5) E4(-4.5,3.5) E5(-3.5,3.5) E6(-2.5,3.5) E7(-1.5,3.5) E8(-0.5,3.5) E9(0.5,3.5) E10(1.5,3.5) E11(2.5,3.5) E12(3.5,3.5) E13(4.5,3.5) E14(5.5,3.5) E15(6.5,3.5) E16(7.5,3.5) F1(-7.5,2.5) F2(-6.5,2.5) F3(-5.5,2.5) F4(-4.5,2.5) F5(-3.5,2.5) F6(-2.5,2.5) F7(-1.5,2.5) F8(-0.5,2.5) F9(0.5,2.5) F10(1.5,2.5) F11(2.5,2.5) F12(3.5,2.5) F13(4.5,2.5) F14(5.5,2.5) F15(6.5,2.5) F16(7.5,2.5) G1(-7.5,1.5) G2(-6.5,1.5) G3(-5.5,1.5) G4(-4.5,1.5) G5(-3.5,1.5) G6(-2.5,1.5) G7(-1.5,1.5) G8(-0.5,1.5) G9(0.5,1.5) G10(1.5,1.5) G11(2.5,1.5) G12(3.5,1.5) G13(4.5,1.5) G14(5.5,1.5) G15(6.5,1.5) G16(7.5,1.5) H1(-7.5,0.5) H2(-6.5,0.5) H3(-5.5,0.5) H4(-4.5,0.5) H5(-3.5,0.5) H6(-2.5,0.5) H7(-1.5,0.5) H8(-0.5,0.5) H9(0.5,0.5) H10(1.5,0.5) H11(2.5,0.5) H12(3.5,0.5) H13(4.5,0.5) H14(5.5,0.5) H15(6.5,0.5) H16(7.5,0.5) J1(-7.5,-0.5) J2(-6.5,-0.5) J3(-5.5,-0.5) J4(-4.5,-0.5) J5(-3.5,-0.5) J6(-2.5,-0.5) J7(-1.5,-0.5) J8(-0.5,-0.5) J9(0.5,-0.5) J10(1.5,-0.5) J11(2.5,-0.5) J12(3.5,-0.5) J13(4.5,-0.5) J14(5.5,-0.5) J15(6.5,-0.5) J16(7.5,-0.5) K1(-7.5,-1.5) K2(-6.5,-1.5) K3(-5.5,-1.5) K4(-4.5,-1.5) K5(-3.5,-1.5) K6(-2.5,-1.5) K7(-1.5,-1.5) K8(-0.5,-1.5) K9(0.5,-1.5) K10(1.5,-1.5) K11(2.5,-1.5) K12(3.5,-1.5) K13(4.5,-1.5) K14(5.5,-1.5) K15(6.5,-1.5) K16(7.5,-1.5) L1(-7.5,-2.5) L2(-6.5,-2.5) L3(-5.5,-2.5) L4(-4.5,-2.5) L5(-3.5,-2.5) L6(-2.5,-2.5) L7(-1.5,-2.5) L8(-0.5,-2.5) L9(0.5,-2.5) L10(1.5,-2.5) L11(2.5,-2.5) L12(3.5,-2.5) L13(4.5,-2.5) L14(5.5,-2.5) L15(6.5,-2.5) L16(7.5,-2.5) M1(-7.5,-3.5) M2(-6.5,-3.5) M3(-5.5,-3.5) M4(-4.5,-3.5) M5(-3.5,-3.5) M6(-2.5,-3.5) M7(-1.5,-3.5) M8(-0.5,-3.5) M9(0.5,-3.5) M10(1.5,-3.5) M11(2.5,-3.5) M12(3.5,-3.5) M13(4.5,-3.5) M14(5.5,-3.5) M15(6.5,-3.5) M16(7.5,-3.5) N1(-7.5,-4.5) N2(-6.5,-4.5) N3(-5.5,-4.5) N4(-4.5,-4.5) N5(-3.5,-4.5) N6(-2.5,-4.5) N7(-1.5,-4.5) N8(-0.5,-4.5) N9(0.5,-4.5) N10(1.5,-4.5) N11(2.5,-4.5) N12(3.5,-4.5) N13(4.5,-4.5) N14(5.5,-4.5) N15(6.5,-4.5) N16(7.5,-4.5) P1(-7.5,-5.5) P2(-6.5,-5.5) P3(-5.5,-5.5) P4(-4.5,-5.5) P5(-3.5,-5.5) P6(-2.5,-5.5) P7(-1.5,-5.5) P8(-0.5,-5.5) P9(0.5,-5.5) P10(1.5,-5.5) P11(2.5,-5.5) P12(3.5,-5.5) P13(4.5,-5.5) P14(5.5,-5.5) P15(6.5,-5.5) P16(7.5,-5.5) R1(-7.5,-6.5) R2(-6.5,-6.5) R3(-5.5,-6.5) R4(-4.5,-6.5) R5(-3.5,-6.5) R6(-2.5,-6.5) R7(-1.5,-6.5) R8(-0.5,-6.5) R9(0.5,-6.5) R10(1.5,-6.5) R11(2.5,-6.5) R12(3.5,-6.5) R13(4.5,-6.5) R14(5.5,-6.5) R15(6.5,-6.5) R16(7.5,-6.5) T1(-7.5,-7.5) T2(-6.5,-7.5) T3(-5.5,-7.5) T4(-4.5,-7.5) T5(-3.5,-7.5) T6(-2.5,-7.5) T7(-1.5,-7.5) T8(-0.5,-7.5) T9(0.5,-7.5) T10(1.5,-7.5) T11(2.5,-7.5) T12(3.5,-7.5) T13(4.5,-7.5) T14(5.5,-7.5) T15(6.5,-7.5) T16(7.5,-7.5)
  silkscreen extent -9.27,-8.5 8.5,8.5, body extent -8.5,-8.5 8.5,8.5, height 1.55
C2012 [mm] "Chip Capacitor, 2-Leads, Body 2.0x1.2mm, IPC Low Density"
  rect 1x1.45 smd: 1(-1.2,0) 2(1.2,0)
  silkscreen extent -0.3,-0.63 0.3,0.63, body extent -0.98,-0.6 1.02,0.6, height 0.5
HDR1X3 [mm] "Connector; Header; 3 Position"
  rect 1.5x1.5 hole 0.9: 1(0,0)
  round 1.5 hole 0.9: 2(2.54,0) 3(5.08,0)
  silkscreen extent -1.27,-1.27 6.35,1.27, body extent -1.27,-1.27 6.35,1.27, height 7.58
HDR1X4 [mm] "Connector; Header; 4 Position"
  rect 1.5x1.5 hole 0.9: 1(0,0)
  round 1.5 hole 0.9: 2(2.54,0) 3(5.08,0) 4(7.62,0)
  silkscreen extent -1.27,-1.27 8.89,1.27
HDR2X6#1 [mm] "Connector; Header; 6x2 Position"
  oct 1.5x1.5 hole 0.9: 1(0,0)
  round 1.5 hole 0.9: 2(0,2.54) 3(2.54,0) 4(2.54,2.54) 5(5.08,0) 6(5.08,2.54) 7(7.62,0) 8(7.62,2.54) 9(10.16,0) 10(10.16,2.54) 11(12.7,0) 12(12.7,2.54)
  silkscreen extent -1.27,-1.27 13.97,3.81, body extent -1.27,-1.27 13.97,3.81, height 7.58
HDR2X6#2 [mm] "Connector; Header; 6x2 Position"
  rect 1.5x1.5 hole 0.9: 1(0,0)
  round 1.5 hole 0.9: 2(0,2.54) 3(2.54,0) 4(2.54,2.54) 5(5.08,0) 6(5.08,2.54) 7(7.62,0) 8(7.62,2.54) 9(10.16,0) 10(10.16,2.54) 11(12.7,0) 12(12.7,2.54)
  silkscreen extent -1.27,-1.27 13.97,3.81, body extent -1.27,-1.27 13.97,3.81, height 7.58
HDR2X8#1 [mm] "Connector; Header; 8x2 Position"
  oct 1.5x1.5 hole 0.9: 1(0,0)
  round 1.5 hole 0.9: 2(0,2.54) 3(2.54,0) 4(2.54,2.54) 5(5.08,0) 6(5.08,2.54) 7(7.62,0) 8(7.62,2.54) 9(10.16,0) 10(10.16,2.54) 11(12.7,0) 12(12.7,2.54) 13(15.24,0) 14(15.24,2.54) 15(17.78,0) 16(17.78,2.54)
  silkscreen extent -1.27,-1.27 19.05,3.81, body extent -1.27,-1.27 19.05,3.81, height 7.58
HDR2X8#2 [mm] "Connector; Header; 8x2 Position"
  rect 1.5x1.5 hole 0.9: 1(0,0)
  round 1.5 hole 0.9: 2(0,2.54) 3(2.54,0) 4(2.54,2.54) 5(5.08,0) 6(5.08,2.54) 7(7.62,0) 8(7.62,2.54) 9(10.16,0) 10(10.16,2.54) 11(12.7,0) 12(12.7,2.54) 13(15.24,0) 14(15.24,2.54) 15(17.78,0) 16(17.78,2.54)
  silkscreen extent -1.27,-1.27 19.05,3.81, body extent -1.27,-1.27 19.05,3.81, height 7.58
HDR2X10 [mm] "Connector; Header; 10x2 Position"
  oct 1.5x1.5 hole 0.9: 1(0,0)
  round 1.5 hole 0.9: 2(0,2.54) 3(2.54,0) 4(2.54,2.54) 5(5.08,0) 6(5.08,2.54) 7(7.62,0) 8(7.62,2.54) 9(10.16,0) 10(10.16,2.54) 11(12.7,0) 12(12.7,2.54) 13(15.24,0) 14(15.24,2.54) 15(17.78,0) 16(17.78,2.54) 17(20.32,0) 18(20.32,2.54) 19(22.86,0) 20(22.86,2.54)
  silkscreen extent -1.27,-1.27 24.13,3.81, body extent -1.27,-1.27 24.13,3.81, height 7.58
"Hearder2 7X2" [mm]
  rect 1.2x1.2 hole 0.8: 1(0,0)
  round 1.2 hole 0.8: 2(2,0) 3(0,-2) 4(2,-2) 5(0,-4) 6(2,-4) 7(0,-6) 8(2,-6) 9(0,-8) 10(2,-8) 11(0,-10) 12(2,-10) 13(0,-12) 14(2,-12)
  silkscreen extent -1,-13 3,1
"key 3*4*2" [mm]
  rect 1.15x1.7 smd: 1(-2.191,0) 2(2.159,0)
  silkscreen extent -2.03,-1.45 2,1.45
"MLT-5020 BZ" [mm]
  rect 1.5x0.8 smd: 0(-1.75,1.75) 1(-1.75,-1.75) 2(1.75,-1.75)
  silkscreen extent -2.6,-2.6 2.6,2.6
QFN127P500X600X100_HS-9N [mm] "QFN, 8-Leads, Body 5.00x6.00mm, Pitch 1.27mm, Thermal Pad 4.00x3.40mm, IPC Medium Density"
  rect 0.6x0.45 smd: 1(-2.675,1.905) 2(-2.675,0.635) 3(-2.675,-0.635) 4(-2.675,-1.905) 5(2.675,-1.905) 6(2.675,-0.635) 7(2.675,0.635) 8(2.675,1.905)
  rect 3x3 smd: 9(0,0)
  silkscreen extent -3.92,-2.65 3.15,2.65, body extent -3,-2.5 3,2.5, height 1
R2012 [mm] "Chip Resistor, 2-Leads, Body 2.0x1.2mm, IPC Low Density"
  rect 1x1.4 smd: 1(-1.2,0) 2(1.2,0)
  silkscreen extent -0.3,-0.6 0.3,0.6, body extent -0.98,-0.6 1.02,0.6, height 0.5
RES*4 [mm]
  rect 0.25x0.3 smd: 1(-0.5,0.75) 2(0.5,0.75) 3(-0.5,0.25) 4(0.5,0.25) 5(-0.5,-0.25) 6(0.5,-0.25) 7(-0.5,-0.75) 8(0.5,-0.75)
  silkscreen extent 0,-0.76 0,0.76
RGB [mil]
  rect 30x30 hole 10: 1(-65,25) 2(-65,-25) 3(65,-25) 4(65,25)
  silkscreen extent -90,-55 65,60
"SOP127P600-8N IS61WV5128" [mm] "IS61WV5128"
  oval 1.65x0.5 smd: 1(-5.575,8.4) 2(-5.575,7.6) 3(-5.575,6.8) 4(-5.575,6) 5(-5.575,5.2) 6(-5.575,4.4) 7(-5.575,3.6) 8(-5.575,2.8) 9(-5.575,2) 10(-5.575,1.2) 11(-5.575,0.4) 12(-5.575,-0.4) 13(-5.575,-1.2) 14(-5.575,-2) 15(-5.575,-2.8) 16(-5.575,-3.6) 17(-5.575,-4.4) 18(-5.575,-5.2) 19(-5.575,-6) 20(-5.575,-6.8) 21(-5.575,-7.6) 22(-5.575,-8.4) 23(5.575,-8.4) 24(5.575,-7.6) 25(5.575,-6.8) 26(5.575,-6) 27(5.575,-5.2) 28(5.575,-4.4) 29(5.575,-3.6) 30(5.575,-2.8) 31(5.575,-2) 32(5.575,-1.2) 33(5.575,-0.4) 34(5.575,0.4) 35(5.575,1.2) 36(5.575,2) 37(5.575,2.8) 38(5.575,3.6) 39(5.575,4.4) 40(5.575,5.2) 41(5.575,6) 42(5.575,6.8) 43(5.575,7.6) 44(5.575,8.4)
  silkscreen extent -5.7,-9.25 4.35,9.32, body extent -5.15,-9.25 5.15,9.25, height 1.2
SOT23_N [mm] "SOT23, 3-Leads, Body 2.9x1.3mm, Pitch 0.95mm, Lead Span 2.3mm - Reverse Pinning, IPC Medium Density"
  rect 1.15x0.6 smd: 1(1.125,0) 2(-1.125,-0.95) 3(-1.125,0.95)
  silkscreen extent -0.2,-1.5 1.47,1.5, body extent -0.7,-1.5 0.7,1.5, height 1.1
TLV712 [mm] "SOT23, 5-Leads, Body 2.90x2.80mm, Pitch 0.95mm, IPC Medium Density"
  rect 1.1x0.6 smd: 1(-1.2,0.95) 2(-1.2,0) 3(-1.2,-0.95) 4(1.2,-0.95) 5(1.2,0.95)
  silkscreen extent -1.32,-1.55 0.25,1.92, body extent -0.87,-1.52 0.87,1.53, height 1.45
TPS701 [mm] "TSOP, 20-Leads, Body 6.50x4.40mm, Pitch 0.65mm, Thermal Pad 3.40.2x2.40.2mm, IPC Medium Density"
  oval 1.7x0.35 smd: 1(-2.85,2.925) 2(-2.85,2.275) 3(-2.85,1.625) 4(-2.85,0.975) 5(-2.85,0.325) 6(-2.85,-0.325) 7(-2.85,-0.975) 8(-2.85,-1.625) 9(-2.85,-2.275) 10(-2.85,-2.925) 11(2.85,-2.925) 12(2.85,-2.275) 13(2.85,-1.625) 14(2.85,-0.975) 15(2.85,-0.325) 16(2.85,0.325) 17(2.85,0.975) 18(2.85,1.625) 19(2.85,2.275) 20(2.85,2.925)
  rect 2.4x3.4 smd: 21(0,0)
  silkscreen extent -2.97,-3.3 1.6,3.77, body extent -2.25,-3.3 2.25,3.3, height 1.2
USB-MICRO-5P-2F [mm]
  round 0 hole 0.7: 0(-3.725,0) 0(1.125,0)
  rect 0.4x1.4 smd: 1(0,0) 5(-2.6,0)
  rect 0.254x1.4 smd: 2(-0.65,0) 3(-1.3,0) 4(-1.95,0)
  rect 1.4x1.9 hole 1.2 slot 1.7 at 90 deg: 6(2.3,2.65) 7(-4.9,2.65)
  silkscreen extent -5.3,-0.7 2.7,5.1
XTAL7_3225#1 [mil]
  rect 47.2x25.6 smd: 1(-47.25,-32.5) 2(47.25,-32.5) 4(-47.25,32.5)
  oct 47.2x25.6 smd: 3(47.25,32.5)
  silkscreen extent -79,-75 79,53
XTAL7_3225#2 [mil]
  rect 47.2x25.6 smd: 1(-47.25,-32.5) 2(47.25,-32.5) 3(47.25,32.5) 4(-47.25,32.5)
  silkscreen extent -79,-75 79,53

## Part data
Boot0 Boot1 Boot2 MCU_CFG1: "Header, 3-Pin"
BT1: "Header, 4-Pin"
C1 C2 C3 C4 C5 C6 C7 C8 C9 C10 C11 C12 C13 C14 C15 C16 C17 C18 C19 C20 C21 C22 C23 C24 C25 C26 C27 C28 C29 C30 C31 C32 C33 C34 C35 C36 C37 C38 C39 C40 C41 C42 C43 C44 C45 C46 C47 C48 C49 C50 C51 C52 C53 C54 C55 C56 C57 C58 C59 C60 C61 C62 C63 C64 C65 C68 C69 C70 C71 C73 C74: "贴片电容"
D1 D2 D3 D4 D5 D6 D7 D8: library part "Diode 1N4148", "High Conductance Fast Diode"
F1 F2 F3 F4: "Fuse"
JTAG1: "Header, 7-Pin, Dual row"
LS1: "Electrical Bell"
P1: "Header, 10-Pin, Dual row"
P2 P3: "Header, 8-Pin, Dual row"
P4 P5 P7 P8: "Header, 6-Pin, Dual row"
Q1: "NPN Bipolar Transistor"
R1 R2 R3 R4 R5 R6 R7 R8 R9 R10 R11 R12 R13 R14 R15 R16 R17 R18 R19 R20 R21 R22 R23 R24 R25 R27 R28 R29 R30 R31 R32 R33 R34 R35 R36 R37 R38 R39 R40 R41 R42 R44 R45 R46 R47 R55 R56 R57 R58 R59 R60 R61 R63 R64 R65 R78 R79 R82: "贴片电阻"
R43: "Resistor"
S1 S5: "Switch"
U4: library part TPS701
U5: library part TLV712
Y1 Y3: library part XTAL1

## Via types
v1: diameter 0.45, hole 0.2, Top Layer to Bottom Layer, 6 vias

## Nets (pads, with @x,y where several pads share a name; then routed paths per layer and width w, separated by ;. In a path a pad name is that pad's centre, name@x,y a point inside that pad or via, vN(x,y) a via of type N, cw(c..) or ccw(c..) an arc to the next point about the centre after c; other vN are vias at no path point)
1V0: C3.1 C5.1 C6.1 C9.1 C10.1 C11.1 C14.1 C15.1 C16.1 C18.1 C19.1 C22.1 F2.1 U1.E10 U1.F7 U1.F9 U1.F11 U1.G6 U1.H9 U1.J6 U1.K9 U1.L8
1V0_IN: C63.1 D3.1 D6.2 F2.2 U5.5
1V8: C4.1 C7.1 C12.1 C17.1 C20.1 C23.1 F4.1 FB1.1 U1.F8 U1.G10 U1.J10 U1.K11 U1.L10
1V8_IN: C65.1 D1.1 D8.2 F4.2 U4.12 U4.13 U4.14
3V3: Boot0.1 Boot1.1 Boot2.1 C1.1 C2.2 C24.1 C25.1 C26.1 C27.1 C28.2 C29.1 C30.1 C31.1 C32.1 C33.1 C34.1 C35.2 C36.1 C37.1 C38.1 C39.1 C40.1 C41.1 C42.1 C43.1 C44.1 C45.1 C46.1 C47.1 C48.1 C49.1 C50.1 C51.1 C52.1 C53.1 C54.1 C55.1 C56.1 C60.2 C61.1 C68.2 D5.2 F3.1 JTAG1.2 LS1.1 P3.3 P3.9 P3.15 P5.1 P5.2 P7.1 P7.2 P8.1 P8.2 R3.1 R8.2 R10.2 R11.2 R12.1 R15.1 R16.1 R18.1 R32.2 R44.2 R45.2 R47.2 U1.A6 U1.A16 U1.B3 U1.B13 U1.C10 U1.D7 U1.E4 U1.E14 U1.F1 U1.H15 U1.J2 U1.J12 U1.L6 U1.L16 U1.M3 U1.M13 U1.N10 U1.P7 U1.R4 U1.R14 U1.T1 U1.T11 U2.8 U3.11 U3.33 Y1.4 Y3.4
3V3_IN: C64.1 D2.1 D7.2 F3.2 R29.1 R31.1 U4.17 U4.18 U4.19
5V0: BT1.4 C21.1 C62.2 D1.2 D2.2 D3.2 F1.1 L4.1 R21.1 R28.2 U4.2 U4.3 U4.7 U4.9 U4.10 U5.1 U5.3
AD1_N: C57.1 R4.1 U1.A10
AD1_P: C57.2 R2.1 U1.B9
AD2_N: C58.1 R6.1 U1.A14
AD2_P: C58.2 R5.1 U1.A13
AD3_N: C59.1 R22.1 U1.A15
AD3_P: C59.2 R7.1 U1.B15
AD4_N: C69.1 R38.1 U1.A7
AD4_P: C69.2 R37.1 U1.B7
AD8_N: C70.1 R40.1 U1.A9
AD8_P: C70.2 R39.1 U1.A8
AD9_N: C71.1 R46.1 U1.A12
AD9_P: C71.2 R41.1 U1.B12
AD10_N: P1.1 U1.B14
AD10_P: P1.2 U1.C14
AD11_N: C73.1 R56.1 U1.B16
AD11_P: C73.2 R55.1 U1.C16
AD12_N: C74.1 R58.1 U1.B5
AD12_P: C74.2 R57.1 U1.B6
ADC1: P1.11 R82.1
ADC2: P1.12 R65.1
ADC3: P1.9 R78.1
ADC4: P1.10 R30.1
ADC5: P1.8 R79.1
ADC6: P1.5 R35.1
ADC7: P1.6 R36.1
ADC8: P1.4 R55.2 R63.2
ADC9: P1.3 R56.2 R63.1
BANK14_IO1: U1.K12
BANK14_IO2: U1.M12
BANK14_IO3: U1.P10
BANK14_IO4: U1.P11
BANK14_IO5: U1.N9
BANK14_IO6: U1.P8
BANK14_IO7: U1.R8
BANK14_IO8: S1.1 U1.R5
BANK14_IO9: U1.R7
BANK14_IO10: U1.P6
BANK15_IO1: U1.D10
BANK15_IO2: P1.16 U1.C8
BANK15_IO3: P1.14 U1.C9
BANK15_IO4: U1.B10
BANK15_IO5: U1.B11
BANK15_IO6: P1.15 U1.D8
BANK15_IO7: P1.13 U1.D9
BANK15_IO8: U1.C11
BANK15_IO9: U1.C12
BANK15_IO10: U1.D13
BANK15_IO11: U1.C13
BANK15_IO12: U1.E12
BANK15_IO13: U1.E13
BANK15_IO14: U1.E11
BANK15_IO15: U1.D11
BANK15_IO16: U1.D14
BANK15_IO17: P2.15 U1.D15
BANK15_IO18: U1.F12
BANK15_IO19: U1.F13
BANK15_IO20: P2.14 U1.E16
BANK15_IO21: P2.16 U1.D16
BANK15_IO22: P2.11 U1.F15
BANK15_IO23: P2.13 U1.E15
BANK15_IO24: U1.H11
BANK15_IO25: U1.G12
BANK15_IO26: U1.H12
BANK15_IO27: U1.H13
BANK15_IO28: P2.12 U1.G14
BANK15_IO29: U1.F14
BANK15_IO30: P2.5 U1.H16
BANK15_IO31: P2.10 U1.G16
BANK15_IO32: P2.3 U1.J15
BANK15_IO33: P2.1 U1.J16
BANK15_IO34: P2.7 U1.H14
BANK15_IO35: P2.9 U1.G15
BANK15_IO36: U1.G11
BANK34_IO1: U1.L5
BANK34_IO2: R43.2 U1.L4
BANK34_IO3: LED1.4 U1.M4
BANK34_IO4: P4.12 U1.M2
BANK34_IO5: LED1.1 U1.M1
BANK34_IO6: U1.N3
BANK34_IO7: P4.10 U1.N2
BANK34_IO8: P4.11 U1.N1
BANK34_IO9: P4.9 U1.P1
BANK34_IO10: P4.2 U1.P4
BANK34_IO11: P4.8 U1.P3
BANK34_IO12: U1.M5
BANK34_IO13: LED1.3 U1.N4
BANK34_IO14: P4.6 U1.R2
BANK34_IO15: P4.7 U1.R1
BANK34_IO16: P4.4 U1.R3
BANK34_IO17: P4.5 U1.T2
BANK34_IO18: P4.1 U1.T4
BANK34_IO19: P4.3 U1.T3
BANK34_IO20: U1.P5
BANK35_IO1: U1.E6
BANK35_IO2: P1.20 U1.A5
BANK35_IO3: R52.4 U1.A4
BANK35_IO4: R52.6 U1.B4
BANK35_IO5: R52.8 U1.A3
BANK35_IO6: P1.18 U1.C7
BANK35_IO7: P1.19 U1.C6
BANK35_IO8: U1.D6
BANK35_IO9: U1.D5
BANK35_IO10: R51.2 U1.C3
BANK35_IO11: R49.2 U1.C2
BANK35_IO12: R51.6 U1.B2
BANK35_IO13: R51.4 U1.A2
BANK35_IO14: R49.4 U1.C1
BANK35_IO15: R51.8 U1.B1
BANK35_IO16: R48.2 U1.E2
BANK35_IO17: R49.8 U1.D1
BANK35_IO18: U1.D4
BANK35_IO19: R52.2 U1.C4
BANK35_IO20: U1.F5
BANK35_IO21: U1.E5
BANK35_IO22: R48.6 U1.F2
BANK35_IO23: R48.4 U1.E1
BANK35_IO24: U1.G5
BANK35_IO25: P3.6 U1.G4
BANK35_IO26: R48.8 U1.G2
BANK35_IO27: R26.7 U1.G1
BANK35_IO28: U1.H5
BANK35_IO29: P3.10 U1.H4
BANK35_IO30: U1.J5
BANK35_IO31: P3.12 U1.J4
BANK35_IO32: R26.5 U1.H2
BANK35_IO33: R26.3 U1.H1
BANK35_IO34: R50.2 U1.J3
BANK35_IO35: P3.8 U1.H3
BANK35_IO36: R50.4 U1.K1
BANK35_IO37: R26.1 U1.J1
BANK35_IO38: P3.16 U1.L3
BANK35_IO39: R50.8 U1.L2
BANK35_IO40: P3.14 U1.K3
BANK35_IO41: R50.6 U1.K2
BANK35_IO42: U1.K5
DIN: MCU_CFG1.1 R13.2 U1.J14
DONE: R8.1 R9.2 U1.H10
EN: C21.2 R21.2 R27.1 U4.6
GCLK: U1.N11 Y1.3
GND: Boot0.3 Boot1.3 Boot2.3 BT1.3 C1.2 C2.1 C3.2 C4.2 C5.2 C6.2 C7.2 C8.1 C9.2 C10.2 C11.2 C12.2 C14.2 C15.2 C16.2 C17.2 C18.2 C19.2 C20.2 C22.2 C23.2 C24.2 C25.2 C26.2 C27.2 C28.1 C29.2 C30.2 C31.2 C32.2 C33.2 C34.2 C35.1 C36.2 C37.2 C38.2 C39.2 C40.2 C41.2 C42.2 C43.2 C44.2 C45.2 C46.2 C47.2 C48.2 C49.2 C50.2 C51.2 C52.2 C53.2 C54.2 C55.2 C56.2 C60.1 C61.2 C62.1 C63.2 C64.2 C65.2 C68.1 D6.1 D7.1 D8.1 FB2.1 JTAG1.1 JTAG1.3 JTAG1.5 JTAG1.7 JTAG1.9 JTAG1.11 JTAG1.13 L1.2 L2.2 MCU_CFG1.3 P1.7 P1.17 P3.5 P3.7 P3.11 P3.13 P5.3 P5.4 P7.3 P7.4 P8.3 P8.4 Q1.2 R4.2 R6.2 R22.2 R23.1 R24.1 R25.1 R27.2 R33.1 R34.1 R38.2 R40.2 R42.1 R46.2 R58.2 R59.1 R60.1 R61.1 R64.1 S5.1 U1.A1 U1.A11 U1.B8 U1.C5 U1.C15 U1.D2 U1.D12 U1.E9 U1.F6 U1.F10 U1.F16 U1.G3 U1.G9 U1.G13 U1.H6 U1.J9 U1.J11 U1.K4 U1.K6 U1.K7 U1.K8 U1.K14 U1.L1 U1.L11 U1.M8 U1.N5 U1.N15 U1.P2 U1.P12 U1.R9 U1.T6 U1.T16 U2.4 U2.9 U3.12 U3.34 U4.8 U4.21 U5.2 U5.4 USB1.5 Y1.2 Y3.2
  other v1: 97.799,75.176 98.899,75.176 97.799,76.276 98.899,76.276 97.799,77.376 98.899,77.376
INIT: R1.2 R11.1 U1.K10
MODE0: Boot0.2 U1.M9
MODE1: Boot1.2 U1.M10
MODE2: Boot2.2 U1.M11
NetC8_2: C8.2 C13.1 FB1.2 U1.G8
NetD4_1: D4.1 USB1.1
NetD5_1: D5.1 LS1.2 Q1.1
NetL1_1: L1.1 R9.1
NetL2_1: L2.1 R1.1
NetL4_2: L4.2 R34.2
NetL5_2: L5.2 R42.2
NetLED1_2: LED1.2 R32.1
NetP5_5: P5.5 R26.8
NetP5_6: P5.6 R50.1
NetP5_7: P5.7 R26.6
NetP5_8: P5.8 R50.3
NetP5_9: P5.9 R26.4
NetP5_10: P5.10 R50.5
NetP5_11: P5.11 R26.2
NetP5_12: P5.12 R50.7
NetP7_5: P7.5 R49.1
NetP7_6: P7.6 R48.1
NetP7_7: P7.7 R49.3
NetP7_8: P7.8 R48.3
NetP7_9: P7.9 R49.5
NetP7_10: P7.10 R48.5
NetP7_11: P7.11 R49.7
NetP7_12: P7.12 R48.7
NetP8_5: P8.5 R52.1
NetP8_6: P8.6 R51.1
NetP8_7: P8.7 R52.3
NetP8_8: P8.8 R51.3
NetP8_9: P8.9 R52.5
NetP8_10: P8.10 R51.5
NetP8_11: P8.11 R52.7
NetP8_12: P8.12 R51.7
NetQ1_2: Q1.3 R43.1
NetR2_2: R2.2 R23.2 R30.2
NetR3_2: R3.2 U1.E7
NetR5_2: R5.2 R24.2 R35.2
NetR7_2: R7.2 R25.2 R36.2
NetR13_1: R13.1 U2.2
NetR14_1: R14.1 R15.2 U2.3
NetR16_2: R16.2 U1.L15
NetR17_2: R17.2 U1.M15
NetR18_2: R18.2 R19.2 U2.7
NetR20_2: R20.2 U2.5
NetR28_1: R28.1 U4.4 U4.5
NetR31_2: R31.2 U4.15
NetR33_2: R33.2 S1.2
NetR37_2: R37.2 R59.2 R65.2
NetR39_2: R39.2 R60.2 R78.2
NetR41_2: R41.2 R61.2 R79.2
NetR57_2: R57.2 R64.2 R82.2
P_GOOD: L5.1 R29.2 U4.16
PROG: JTAG1.14 R10.1 S5.2 U1.L9
QEI_B1: R49.6 U1.D3
QEI_B2: P3.4 U1.F4
QEI_B3: P3.2 U1.F3
QSPI_CS: R12.2 U1.L12 U2.1
QSPI_DQ0: R20.1 U1.J13
QSPI_DQ2: R14.2 U1.K15
QSPI_DQ3: R19.1 U1.K16
QSPI_SCK: MCU_CFG1.2 R17.1 U1.E8 U2.6
SRAM-A0: U1.P14 U3.3
SRAM-A1: U1.T15 U3.4
SRAM-A2: U1.R15 U3.5
SRAM-A3: U1.R16 U3.6
SRAM-A4: U1.P15 U3.7
SRAM-A5: U1.N13 U3.16
SRAM-A6: U1.L13 U3.17
SRAM-A7: U1.M14 U3.18
SRAM-A8: U1.L14 U3.19
SRAM-A9: U1.K13 U3.20
SRAM-A10: U1.T14 U3.26
SRAM-A11: U1.R13 U3.27
SRAM-A12: U1.T13 U3.28
SRAM-A13: U1.R12 U3.29
SRAM-A14: U1.T12 U3.30
SRAM-A15: U1.T8 U3.38
SRAM-A16: U1.T7 U3.39
SRAM-A17: U1.R6 U3.40
SRAM-A18: U1.T5 U3.41
SRAM-CE: R47.1 U1.P16 U3.8
SRAM-DQ0: U1.N14 U3.9
SRAM-DQ1: U1.N16 U3.10
SRAM-DQ2: U1.M16 U3.13
SRAM-DQ3: U1.N12 U3.14
SRAM-DQ4: U1.R11 U3.31
SRAM-DQ5: U1.R10 U3.32
SRAM-DQ6: U1.T10 U3.35
SRAM-DQ7: U1.T9 U3.36
SRAM-OE: U1.P9 U3.37
SRAM-WE: U1.P13 U3.15
TCK: JTAG1.6 R45.1 U1.L7
TDI_FPGA: JTAG1.10 U1.N7
TDO_FPGA: JTAG1.8 U1.N8
TMS: JTAG1.4 R44.1 U1.M7
UART_RX: BT1.2 U1.N6
UART_TX: BT1.1 U1.M6
VBUS: D4.2 F1.2
XADCGND: C13.2 FB2.2 U1.G7 U1.H7 U1.H8 U1.J7 U1.J8
XCLK: U1.E3 Y3.3
pads on no net: JTAG1.12 LS1.0 P2.2 P2.4 P2.6 P2.8 P3.1 U3.1 U3.2 U3.21 U3.22 U3.23 U3.24 U3.25 U3.42 U3.43 U3.44 U4.1 U4.11 U4.20 USB1.0 USB1.2 USB1.3 USB1.4 USB1.6 USB1.7 Y1.1 Y3.1
copper on no net: | length 55.5
  Top Layer w0.127: 92.532,46.66 94.48,46.66 ; 92.532,46.787 94.099,46.787 ; 92.532,46.914 93.718,46.914 ; 92.659,45.263 94.734,45.263 ; 92.786,46.533 92.956,46.533 ; 92.913,45.39 93.464,45.39 ; 93.04,45.136 94.607,45.136 ; 93.167,45.517 93.464,45.517 ; 93.167,45.644 93.464,45.644 ; 93.167,45.771 93.464,45.771 ; 93.167,45.898 93.464,45.898 ; 93.167,46.025 93.464,46.025 ; 93.167,46.152 93.464,46.152 ; 93.167,46.533 94.607,46.533 ; 93.294,44.882 94.099,44.882 ; 93.294,45.009 94.353,45.009 ; 93.294,46.279 93.591,46.279 ; 93.294,46.406 93.591,46.406 ; 93.421,44.755 93.972,44.755 ; 93.929,45.39 94.861,45.39 ; 94.183,45.517 94.861,45.517 ; 94.31,45.644 94.988,45.644 ; 94.31,46.406 94.734,46.406 ; 94.437,45.771 94.988,45.771 ; 94.564,45.898 94.988,45.898 ; 94.564,46.025 94.988,46.025 ; 94.691,46.152 94.988,46.152 ; 94.691,46.279 94.861,46.279 ; 95.199,46.66 97.147,46.66 ; 95.199,46.787 96.766,46.787 ; 95.199,46.914 96.385,46.914 ; 95.326,45.263 97.401,45.263 ; 95.453,46.533 95.623,46.533 ; 95.58,45.39 96.131,45.39 ; 95.707,45.136 97.274,45.136 ; 95.834,45.517 96.131,45.517 ; 95.834,45.644 96.131,45.644 ; 95.834,45.771 96.131,45.771 ; 95.834,45.898 96.131,45.898 ; 95.834,46.025 96.131,46.025 ; 95.834,46.152 96.131,46.152 ; 95.834,46.533 97.274,46.533 ; 95.961,44.882 96.766,44.882 ; 95.961,45.009 97.02,45.009 ; 95.961,46.279 96.258,46.279 ; 95.961,46.406 96.258,46.406 ; 96.088,44.755 96.639,44.755 ; 96.596,45.39 97.528,45.39 ; 96.85,45.517 97.528,45.517 ; 96.977,45.644 97.655,45.644 ; 96.977,46.406 97.401,46.406 ; 97.104,45.771 97.655,45.771 ; 97.231,45.898 97.655,45.898 ; 97.231,46.025 97.655,46.025 ; 97.358,46.152 97.655,46.152 ; 97.358,46.279 97.528,46.279 ; 98.12,45.136 98.544,45.136 ; 98.12,45.263 98.544,45.263 ; 98.12,45.39 98.544,45.39 ; 98.247,44.882 98.544,44.882 ; 98.247,45.009 98.544,45.009 ; 98.247,45.517 98.544,45.517 ; 98.247,45.644 99.052,45.644 ; 98.247,45.771 99.179,45.771 ; 98.247,45.898 98.671,45.898 ; 98.247,46.025 98.671,46.025 ; 98.247,46.152 98.671,46.152 ; 98.247,46.279 98.671,46.279 ; 98.247,46.406 98.671,46.406 ; 98.247,46.533 98.798,46.533 ; 98.247,46.914 98.671,46.914 ; 98.374,44.755 98.544,44.755 ; 98.374,46.66 98.798,46.66 ; 98.374,46.787 98.671,46.787 ; 98.374,47.041 98.544,47.041 ; 98.755,45.517 99.306,45.517 ; 98.882,45.39 99.433,45.39 ; 99.009,45.263 99.56,45.263 ; 99.009,45.898 99.306,45.898 ; 99.136,45.136 99.814,45.136 ; 99.136,46.025 99.433,46.025 ; 99.136,46.152 99.56,46.152 ; 99.263,46.279 99.941,46.279 ; 99.39,45.009 99.941,45.009 ; 99.39,46.406 99.941,46.406 ; 99.39,46.533 100.068,46.533 ; 99.517,44.882 100.068,44.882 ; 99.517,46.66 100.068,46.66 ; 99.644,46.787 100.068,46.787 ; 99.771,44.755 100.068,44.755 ; 99.771,46.914 99.941,46.914

## Polygon pours and split planes (outlines as drawn)
GND on GND Plane 1 (split plane): 86.346,95.73 164.316,95.73 164.328,95.731 164.441,95.724 164.565,95.699 164.684,95.659 164.797,95.603 164.901,95.533 164.996,95.45 165.079,95.356 165.149,95.251 165.204,95.139 165.245,95.019 165.269,94.896 165.277,94.783 165.275,94.771 165.275,44.481 165.277,44.467 165.268,44.341 165.241,44.203 165.196,44.07 165.134,43.945 165.056,43.828 164.964,43.723 164.858,43.63 164.742,43.552 164.616,43.49 164.483,43.445 164.346,43.418 164.219,43.41 164.206,43.411 86.556,43.411 86.541,43.41 86.383,43.418 86.213,43.447 86.047,43.495 85.887,43.561 85.735,43.645 85.594,43.745 85.466,43.86 85.35,43.989 85.25,44.13 85.167,44.282 85.1,44.441 85.053,44.607 85.024,44.778 85.015,44.935 85.016,44.951 85.016,94.401 85.015,94.414 85.023,94.55 85.048,94.697 85.089,94.84 85.146,94.978 85.218,95.109 85.305,95.231 85.404,95.342 85.516,95.442 85.637,95.528 85.768,95.6 85.906,95.657 86.05,95.699 86.197,95.724 86.333,95.731
3V3 on 3v3 Plane 2 (split plane): 86.346,95.73 164.316,95.73 164.328,95.731 164.441,95.724 164.565,95.699 164.684,95.659 164.797,95.603 164.901,95.533 164.996,95.45 165.079,95.356 165.149,95.251 165.204,95.139 165.245,95.019 165.269,94.896 165.277,94.783 165.275,94.771 165.275,44.481 165.277,44.467 165.268,44.341 165.241,44.203 165.196,44.07 165.134,43.945 165.056,43.828 164.964,43.723 164.858,43.63 164.742,43.552 164.616,43.49 164.483,43.445 164.346,43.418 164.219,43.41 164.206,43.411 86.556,43.411 86.541,43.41 86.383,43.418 86.213,43.447 86.047,43.495 85.887,43.561 85.735,43.645 85.594,43.745 85.466,43.86 85.35,43.989 85.25,44.13 85.167,44.282 85.1,44.441 85.053,44.607 85.024,44.778 85.015,44.935 85.016,44.951 85.016,94.401 85.015,94.414 85.023,94.55 85.048,94.697 85.089,94.84 85.146,94.978 85.218,95.109 85.305,95.231 85.404,95.342 85.516,95.442 85.637,95.528 85.768,95.6 85.906,95.657 86.05,95.699 86.197,95.724 86.333,95.731

## Keep-outs
Keep-Out Layer:
  the board outline again, w0.254

## Silkscreen, mask and mechanical layers (free items; w line width, h text height)
Top Overlay:
  text "3V3" at 122.86,95.123 h0.76
  text "GND" at 125.387,95.123 h0.76
  text "GND" at 127.914,95.123 h0.76
  text "3V3" at 130.442,95.123 h0.76
  text "GND" at 132.969,95.123 h0.76
  text "GND" at 135.496,95.123 h0.76
  text "3V3" at 138.024,95.123 h0.76
  text "5V" at 93.65,91.948 h0.76
  text "GND" at 96.012,91.948 h0.76
  text "5V" at 86.995,91.389 h0.76
  text ">" at 91.516,90.068 h0.76 r270
  text "5V" at 96.469,89.535 h0.76
  text "GND" at 86.944,87.909 h0.76
  text "<" at 98.069,87.833 h0.76
  text "+" at 120.472,87.605 h0.76
  text "5V" at 93.066,87.224 h0.76
  text ">" at 124.765,86.462 h0.76 r90
  text "1V0" at 101.067,86.208 h0.76
  text "F" at 91.643,84.684 h0.76
  text "F" at 103.454,84.404 h1.27
  text "10uF" at 95.682,84.353 h0.76 r90
  text "10uF" at 100.787,84.277 h0.76 r90
  text "5K1" at 85.649,84.201 h0.76
  text "<" at 88.697,84.176 h0.76
  text "5V" at 94.844,82.601 h0.76
  text "5V" at 90.043,82.067 h0.76
  text "<" at 98.12,81.305 h0.76
  text ">" at 115.748,80.289 h0.76 r270
  text ">" at 118.643,80.289 h0.76 r270
  text "1K5" at 128.956,79.705 h0.76
  text "3V3" at 90.119,79.477 h0.76 r90
  text "F" at 108.102,79.4 h1.27
  text "10K" at 90.221,79.324 h0.76
  text "10uF" at 91.542,79.324 h0.76
  text "20K" at 93.091,79.324 h0.76
  text "10uF" at 104.521,79.299 h0.76 r90
  text "250K" at 103.81,77.622 h0.76
  text "TMS" at 90.119,77.489 h0.76 r90
  text "2K" at 110.236,76.911 h0.76
  text ">" at 107.645,75.921 h0.76
  text "TCK" at 90.119,75.501 h0.76 r90
  text "2K" at 93.32,74.727 h0.76 r90
  text "250K" at 103.81,74.473 h0.76
  text "1K" at 147.422,74.295 h0.76
  text "F" at 108.509,73.812 h1.27
  text "TDO" at 90.119,73.514 h0.76 r90
  text "1K" at 112.7,73.076 h0.76 r90
  text "5V" at 93.65,72.771 h0.76
  text "1nF" at 144.069,72.746 h0.76 r90
  text "2K23" at 150.393,72.517 h0.76
  text "10uF" at 104.47,72.466 h0.76 r90
  text "TDI" at 90.113,71.526 h0.76 r90
  text "1nF" at 144.069,70.703 h0.76 r90
  text "<" at 98.095,70.688 h0.76
  text "2K23" at 150.444,70.383 h0.76
  text "2K23" at 150.444,69.317 h0.76
  text "5V" at 96.342,69.088 h0.76
  text "1nF" at 144.069,68.66 h0.76 r90
  text "PRO" at 90.119,67.386 h0.76 r90
  text "2K23" at 150.444,67.335 h0.76
  text "1nF" at 144.069,66.617 h0.76 r90
  text "1nF" at 144.069,64.574 h0.76 r90
  text "2K23" at 150.444,64.186 h0.76
  text "2K23" at 150.444,63.221 h0.76
  text "3V3" at 88.443,63.119 h0.76
  text "3V3" at 92.837,63.119 h0.76
  text "1nF" at 144.069,62.531 h0.76 r90
  text "2K23" at 150.444,61.112 h0.76
  text "1nF" at 144.069,60.488 h0.76 r90
  text "1nF" at 144.069,58.445 h0.76 r90
  text "GND" at 88.417,57.861 h0.76
  text "GND" at 92.786,57.861 h0.76
  text "M0" at 86.106,55.474 h1.27
  text "M1" at 90.653,55.479 h1.27
  text "M2" at 94.996,55.474 h1.27
  text "May the Force be with You ! ! !" at 123.241,55.169 h2.54
  text "DIN" at 88.742,51.613 h0.76 r270
  text "SCK" at 88.748,49.057 h0.76 r270
  text "GND" at 88.748,46.457 h0.76 r270
Bottom Overlay:
  text "1K" at 121.437,90.576 h0.76 r270
  text "PT" at 98.933,87.655 h1.27
  text "104" at 139.217,85.979 h0.76
  text "PT" at 98.958,81.178 h1.27
  text "GND" at 140.03,80.416 h0.76 r270
  text "10K" at 91.211,78.638 h0.51
  text "10K" at 91.237,76.479 h0.51
  text "100R" at 116.256,76.241 h0.76 r90
  text "100R" at 119.228,76.241 h0.76 r90
  text "4K7" at 113.157,76.098 h0.76 r90
  text "4K7" at 114.656,76.098 h0.76 r90
  text "200R" at 117.78,76.099 h0.76 r90
  text "4K7" at 139.598,71.095 h1.27
  text "PT" at 98.958,70.561 h1.27
  text "GND" at 122.276,66.65 h0.76 r270
  text "104" at 124.943,61.036 h0.76
  text "104" at 106.858,60.503 h0.76 r180
  text "49R9" at 137.363,59.258 h0.76
  text "1K" at 130.835,58.903 h1.27 r90
  text "1K" at 106.248,56.566 h0.76
  text "1K8" at 127.076,56.515 h0.76 r90
  text "100R" at 127.079,55.406 h0.64 r90
  text "104" at 106.02,54.915 h0.76 r90
  text "100R" at 141.732,54.762 h0.76
  text "100R" at 127.079,53.902 h0.64 r90
  text "100R" at 141.732,53.873 h0.76
  text "104" at 144.323,53.111 h0.76 r90
  text "4K7" at 127.076,52.07 h0.76 r90
  text "1K8" at 141.503,50.622 h0.76

## Text inside footprints (layer, text, board x,y; h text height)
LS1: Top Overlay "+" at 127.787,88.621 h0.76 r270